# Allegro board CUITBIKE_V1.1_MSP430.brd
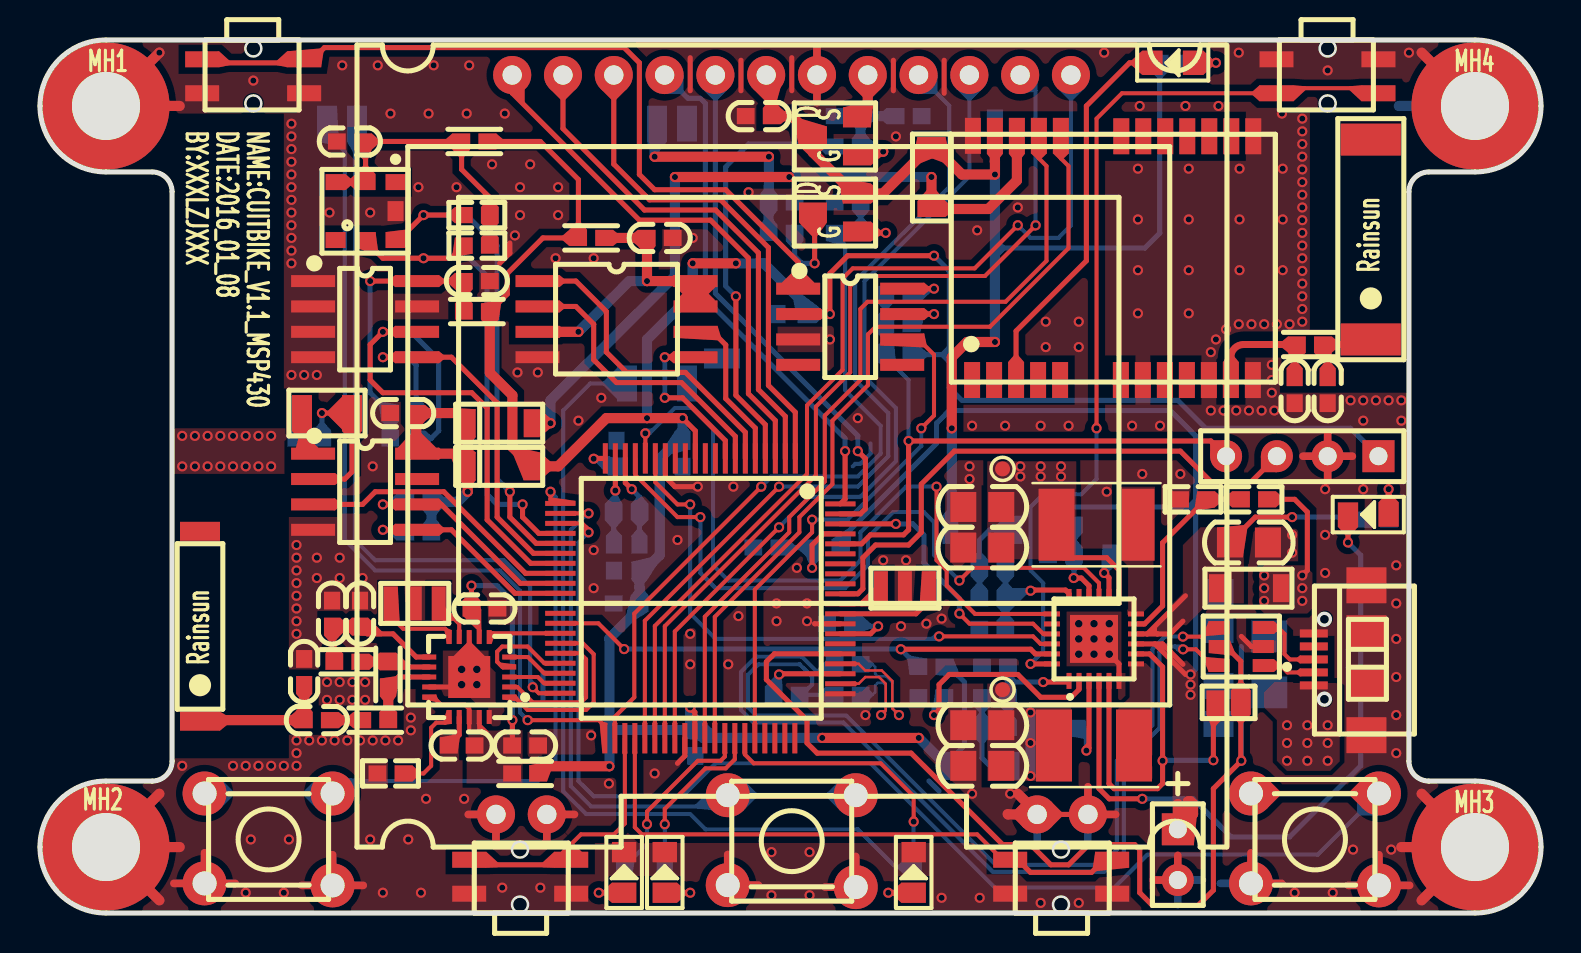
[diagram p0: board, top side]
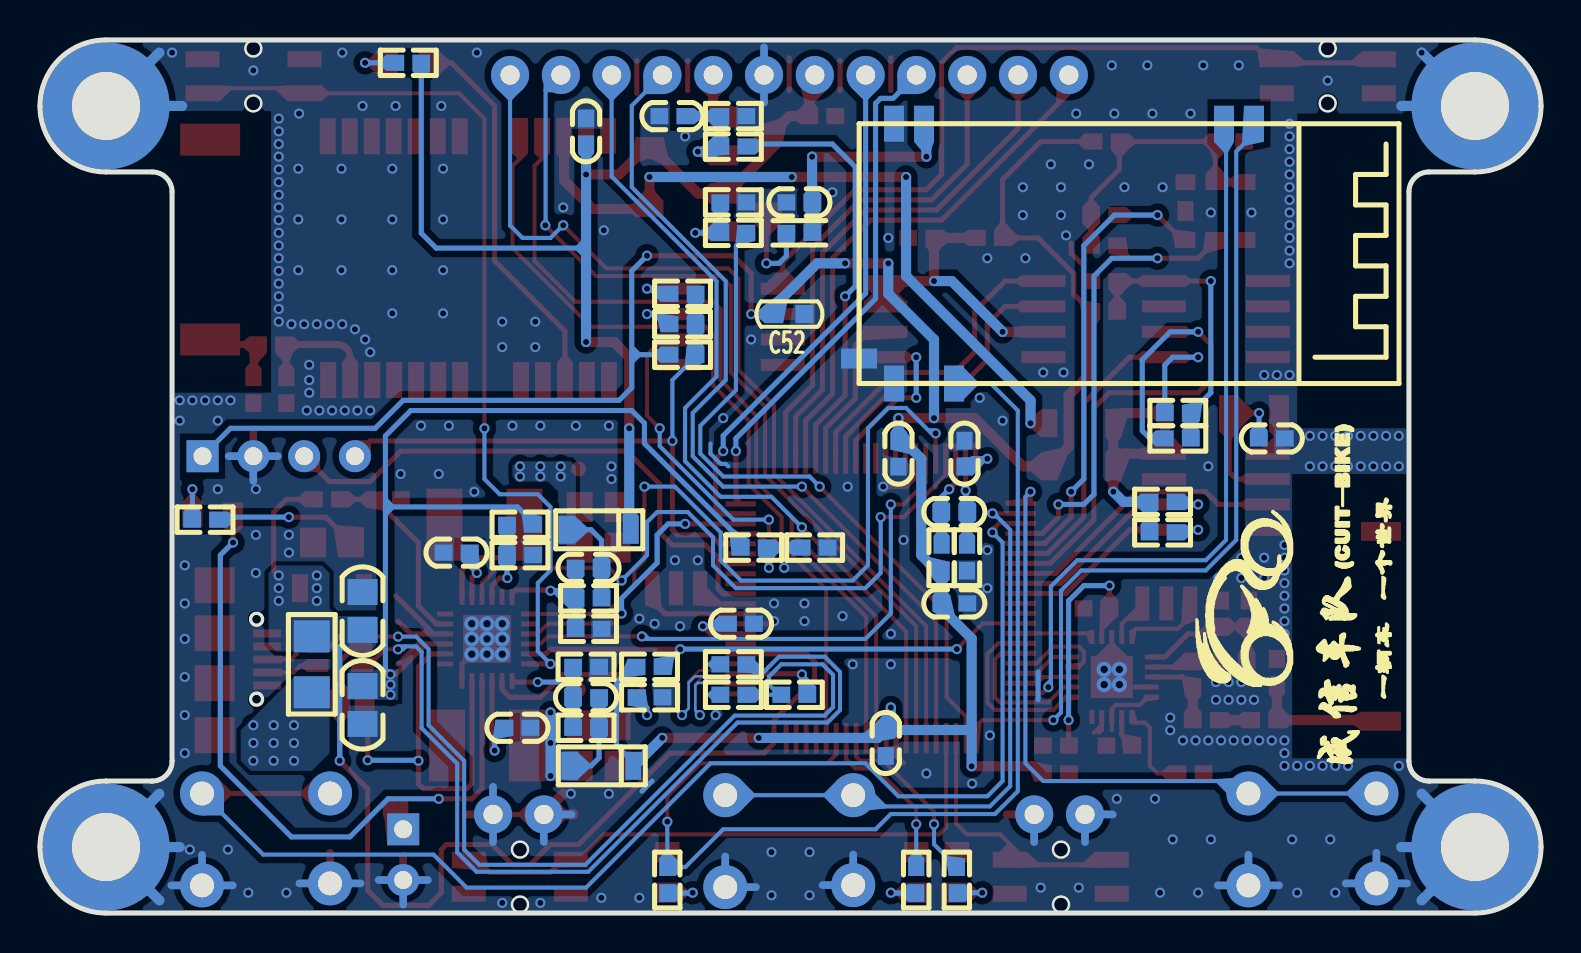
[diagram p1: board, bottom side, seen from below]

Outline 75.06 x 43.69 mm; copper layers: TOP, BOTTOM. Coordinates in mm from the lower left corner of the outline.
Outline path: 0,40.39 arc(0.97,42.72) 3.3,43.69 71.75,43.69 arc(74.09,42.72) 75.06,40.39 arc(74.09,38.05) 71.75,37.08 69.45,37.08 arc(68.75,36.79) 68.45,36.08 68.45,7.6 arc(68.75,6.9) 69.45,6.6 71.75,6.6 arc(74.09,5.64) 75.06,3.3 arc(74.09,0.97) 71.75,0 3.3,0 arc(0.97,0.97) 0,3.3 arc(0.97,5.64) 3.3,6.6 5.6,6.6 arc(6.31,6.9) 6.6,7.6 6.6,36.08 arc(6.31,36.79) 5.6,37.08 3.3,37.08 arc(0.97,38.05) 0,40.39

## Design rules (mm)
net group DP1: nets USB_DN USB_DP

## Placement (name value [footprint] x y rotation side)
ANT1  -  [AN9520-245]  8 14.35 90 top
ANT2  -  [GPS1003-1575]  66.55 28.7 90 top
BAT1  -  [BATTERY]  56.9 4.19 270 top
C1  10uF  [C0805]  58.93 15.11 270 bottom
C2  10uF  [C0805]  60.45 18.54 180 top
C3  0.1uF  [C0603]  54.23 18.03 180 bottom
C4  0.1uF  [C0603]  51.18 9.27 0 bottom
C5  10pF  [C0603]  47.62 17.27 180 bottom
C6  10uF  [C0805]  47.12 18.29 0 top
C7  10uF  [C0805]  47.12 20.32 0 top
C8  10pF  [C0603]  47.75 10.79 180 bottom
C9  10uF  [C0805]  47.12 9.4 0 top
C10  10uF  [C0805]  47.12 7.37 0 top
C11  10uF  [C0805]  58.93 10.41 90 bottom
C12  0.1uF  [C0603]  40.01 14.48 180 bottom
C16  10uF  [C0603]  29.34 15.49 0 bottom
C17  0.1uF  [C0603]  32.13 22.99 90 bottom
C18  0.1uF  [C0603]  32.77 8.51 90 bottom
C19  0.1uF  [C0603]  29.34 20.07 0 bottom
C20  0.1uF  [C0603]  28.83 22.99 270 bottom
C21  0.1uF  [C0603]  18.16 25.02 180 top
C22  0.1uF  [C0603]  21.84 31.62 0 top
C23  12pF  [C0603]  13.46 23.75 0 bottom
C24  0.1uF  [C0603]  15.49 38.61 180 top
C25  0.1uF  [C0603]  21.08 8.38 0 top
C26  0.1uF  [C0603]  30.99 33.78 180 top
C27  0.1uF  [C0603]  24.26 8.38 0 top
C28  1.5pF  [C0603]  13.84 9.65 180 top
C29  1pF  [C0603]  13.21 12.06 90 top
C33  0.1uF  [C0603]  22.23 15.24 0 top
C34  2.2nF  [C0603]  16 14.99 90 top
C35  4.7pF  [C0603]  14.61 14.99 90 top
C36  0.1uF  [C0603]  35.94 39.88 0 top
C37  10nF  [C0603]  43.43 39.88 180 bottom
C38  0.1uF  [C0603]  47.75 39.12 270 bottom
C42  0.1uF  [C0603]  37.08 35.56 0 bottom
C43  10nF/NI  [C0603]  62.74 26.16 90 top
C44  10nF/NI  [C0603]  64.39 26.16 90 top
C52  0.1uF  [CC0603]  37.59 29.97 180 bottom
D1  MBRM120  [SOD-123]  60.45 16.26 180 top
D2  MBR0520  [SOD-123]  22.99 22.35 180 top
D4  MBR0520  [SOD-123]  22.99 24.51 180 top
D5  MBRM120  [SOD-123]  44.58 36.83 270 top
D6  MBR0520  [SOD-123]  46.99 7.37 180 bottom
D7  MBR0520  [SOD-123]  47.12 19.18 180 bottom
F1  1.5A  [R1206]  61.47 12.45 90 bottom
J1  JUMP_2P  [JUMP-2P]  59.44 10.54 180 top
J2  CON4  [SIP-4-2R5]  66.93 22.86 180 top
L1  4.7uH  [L4532-P]  52.83 19.43 180 top
L2  4.7uH  [L4532-P]  52.7 8.38 180 top
L3  BEAD  [L0603]  21.72 38.61 0 top
L4  BEAD  [L0603]  21.84 30.1 0 top
L5  BEAD  [L0603]  24.26 6.99 180 top
L6  BEAD  [L0603]  27.56 33.78 180 top
L8  3.9nH  [L0603]  16.76 9.65 180 top
L9  8.2nH  [L0603]  17.4 11.94 90 top
L10  2.7nH  [L0603]  15.37 12.57 180 top
L12  BEAD  [L0603]  37.08 34.04 180 bottom
L13  0R  [L0603]  63.5 28.45 180 top
LED1  LED-RED  [LED0805]  66.42 19.94 180 top
LED2  LED-RED  [LED0805]  29.21 2.03 90 top
LED3  LED-RED  [LED0805]  31.24 2.03 90 top
LED5  LED-GREEN/NI  [LED0805]  56.64 42.55 180 top
LED6  LED-GREEN  [LED0805]  43.69 2.03 90 top
MH1  Hold  [HOLD250D134]  3.3 40.39 0 top
MH2  Hold  [HOLD250D134]  3.3 3.3 0 top
MH3  Hold  [HOLD250D134]  71.75 3.3 0 top
MH4  Hold  [HOLD250D134]  71.75 40.39 0 top
NOREF  -  []  3.3 0 90 top
NOREF#2  -  []  0 3.3 0 top
Q1  SI2301  [SOT23-MOS]  39.75 38.86 90 top
Q2  SI2301  [SOT23-MOS]  39.75 35.05 90 top
R1  1M  [R0603]  44.58 12.32 180 bottom
R2  1.24K  [R0603]  66.8 19.68 0 bottom
R3  3.32K  [R0603]  60.71 20.7 180 top
R4  1.24K  [R0603]  57.66 20.7 180 top
R5  249k  [R0603]  47.62 15.75 0 bottom
R6  1.24K  [R0603]  44.58 10.79 180 bottom
R7  2.49M  [R0603]  51.05 19.43 0 bottom
R8  249k  [R0603]  47.75 9.27 0 bottom
R9  80.6K  [R0603]  47.62 14.22 180 bottom
R10  1.5K  [R0603]  37.34 10.92 0 bottom
R11  22R  [R0603]  40.39 10.92 0 bottom
R12  22R  [R0603]  40.39 12.45 0 bottom
R13  806K  [R0603]  51.05 17.91 180 bottom
R14  80.6K  [R0603]  47.75 12.32 180 bottom
R15  200K  [R0603]  39.37 18.29 180 bottom
R16  100K  [R0603]  36.32 18.29 180 bottom
R18  0R  [R0603]  29.97 17.78 90 bottom
R19  0R  [R0603]  28.7 17.78 90 bottom
R20  470R  [R0603]  29.21 1.65 270 bottom
R21  470R  [R0603]  31.24 1.65 270 bottom
R22  4.7K  [R0603]  21.84 34.92 180 top
R23  4.7K  [R0603]  21.84 33.4 180 top
R24  4.7K  [R0603]  18.16 23.75 0 bottom
R25  4.7K  [R0603]  18.16 25.02 0 bottom
R26  4.7K  [R0603]  18.92 20.57 180 bottom
R27  4.7K  [R0603]  18.92 19.05 180 bottom
R31  22K  [R0603]  17.53 6.99 180 top
R32  10K  [R0603]  40.39 38.35 0 bottom
R33  100K  [R0603]  40.39 39.88 180 bottom
R34  510R/NI  [R0603]  56.64 42.55 180 bottom
R36  470R  [R0603]  43.69 1.65 270 bottom
R37  100K  [R0603]  40.39 35.56 0 bottom
R38  10K  [R0603]  40.39 34.04 180 bottom
R40  47K  [R0603]  42.93 27.94 0 bottom
R44  0R/NI  [R0603]  42.93 30.99 0 bottom
R45  0R/NI  [R0603]  42.93 29.46 0 bottom
SW1  SW-4P-5R4x4R5  [SW-4P-5R4X4R5]  66.93 41.02 180 top
SW2  RESET  [SW-4P-5R4X4R5]  13.21 41.02 180 top
SW3  BACK  [SW-6X6]  11.43 3.68 270 top
SW4  ENTER  [SW-6X6]  37.59 3.6 270 top
SW5  MENU  [SW-6X6]  63.75 3.68 270 top
SW6  UP  [SW-4P-5R4X4R5]  48.51 2.67 0 top
SW7  DOWN  [SW-4P-5R4X4R5]  21.46 2.67 0 top
TP1  TEST P  [TP-0R75]  48.13 22.23 0 top
TP2  TEST P  [TP-0R75]  48.13 11.18 0 top
U1  LTC3455  [QFN-24]  52.7 13.72 90 top
U2  USBLC6-2  [SOT23-6]  60.07 13.34 90 top
U3  MSP430F5529  [QFP-80]  33.02 15.75 270 top
U4  -  [BMP180]  16.26 35.18 270 top
U5  AT24Cxx  [SOIC8]  16.26 29.72 270 top
U6  PCF8563  [SOIC8]  16.26 21.08 270 top
U8  W25Qxx  [SO-8-208]  28.83 29.72 270 top
U9  NRF24L01  [TQFN-4X4-20]  21.46 11.81 90 top
U10  -  [JLX12864G-086]  23.62 41.91 0 top
U11  -  [NEO-6M]  46.61 26.67 90 top
U12  -  [HC-06]  14.35 39.5 270 bottom
U16  SP706REN  [SOIC8]  40.51 29.34 270 top
USB1  -  [USB-MICRO]  63.63 12.7 90 top
X1  CSTCE-8M00  [X-3P-3R2X1R3-SMD]  44.45 16.26 180 top
X3  32.768K  [X-2P-3R2X1R5-SMD]  14.35 25.02 180 top
X4  CSTCE-16M00  [X-3P-3R2X1R3-SMD]  19.94 15.49 180 top

## Library data of the parts
ANT1 ANT2 = AN9520-245
BAT1 = BATTERY
C1-C12 C16-C29 C33-C38 C42-C44 = CAP
C52 = C_Generic
D1 D2 D4-D7 = D SCHOTTKY
F1 = FUSE
J1 = JUMP_2P
J2 = CON4
L1-L6 L8-L10 L12 L13 = INDUCTOR
LED1-LED3 LED5 LED6 = LED
MH1-MH4 = Hold_1
Q1 Q2 = MOS P
R1-R16 R18-R27 R31-R34 R36-R38 R40 R44 R45 = RES1
SW1-SW7 = SWITCH-SPST-4P
TP1 TP2 = TEST P
U1 = LTC3455
U2 = USBLC6-2
U3 = MSP430F5529
U4 = BMP180
U5 = AT24Cxx
U6 = PCF8563
U8 = W25Qxx
U9 = NRF24L01
U10 = JLX12864G-086
U11 = NEO-6M
U12 = HC-06
U16 = SP706T
USB1 = USB-MINI
X1 X4 = CSTCE-8M00
X3 = XTAL

## Footprints (pads in the part's own frame, mm; a bottom-side part is the same pattern mirrored in y, then rotated)
AN9520-245
  rect 0.95x2 smd: 1(-4.75,0) 2(4.75,0)
BATTERY
  rect 1.6x1.6 hole 0.9: 1(0,0)
  round 1.6 hole 0.9: 2(2.54,0)
BMP180
  rect 0.8x1 smd: 1(-1.397,1.524) 2(-1.397,0.024) 3(-1.397,-1.476) 4(1.503,-1.476) 5(1.503,0.024) 6(1.503,1.524)
  rect 1x0.8 smd: 7(0.053,1.524)
C0603
  rect 0.89x0.81 smd: 1(-0.65,0) 2(0.65,0)
C0805
  rect 1.3x1.5 smd: 1(-0.95,0) 2(0.95,0)
CC0603
  rect 0.914x0.914 smd: 1(-0.762,0) 2(0.762,0)
GPS1003-1575
  rect 1.6x3 smd: 1(0,0) 2(10,0)
HC-06
  rect 1.8x1 smd: 1(0,0) 2(0,-1.5) 12(0,-16.5) 13(0,-18) 22(13,-18) 24(13,-15)
  rect 1x1.8 smd: 21(11.75,-19.75)
HOLD250D134
  round 6.35 hole 3.404: 1(0,0)
JLX12864G-086
  round 1.905 hole 0.965: 1(27.93,0.024) 2(25.39,0.024) 3(22.85,0.024) 4(20.31,0.024) 5(17.77,0.024) 6(15.23,0.024) 7(12.69,0.024) 8(10.15,0.024) 9(7.61,0.024) 10(5.07,0.024) 11(2.53,0.024) 12(-0.01,0.024) 13(-0.82,-36.976) 14(1.72,-36.976) 15(26.24,-36.976) 16(28.78,-36.976)
JUMP-2P
  rect 1x1.2 smd: 1(-0.61,0) 2(0.61,0)
L0603
  rect 0.89x0.81 smd: 1(-0.65,0) 2(0.65,0)
L4532-P
  rect 1.8x3.6 smd: 1(-2,0) 2(2,0)
LED0805
  rect 1.016x1.219 smd: 1(-1.016,0) 2(1.016,0)
NEO-6M
  rect 1.8x0.8 smd: 1(0,0) 2(0,-1.1) 3(0,-2.2) 4(0,-3.3) 5(0,-4.4) 6(0,-7.44) 7(0,-8.54) 8(0,-9.64) 9(0,-10.74) 10(0,-11.84) 11(0,-12.94) 12(0,-14.04) 13(12.2,-14.06) 14(12.2,-12.96) 15(12.2,-11.86) 16(12.2,-10.76) 17(12.2,-9.66) 18(12.2,-8.56) 19(12.2,-7.46) 20(12.22,-4.44) 21(12.22,-3.34) 22(12.22,-2.24) 23(12.22,-1.14) 24(12.22,-0.04)
QFN-24
  rect 0.8x0.25 smd: 1(-2.1,1.25) 2(-2.1,0.75) 3(-2.1,0.25) 4(-2.1,-0.25) 5(-2.1,-0.75) 6(-2.1,-1.25) 13(2.1,-1.25) 14(2.1,-0.75) 15(2.1,-0.25) 16(2.1,0.25) 17(2.1,0.75) 18(2.1,1.25)
  rect 0.25x0.8 smd: 7(-1.25,-2.1) 8(-0.75,-2.1) 9(-0.25,-2.1) 10(0.25,-2.1) 11(0.75,-2.1) 12(1.25,-2.1) 19(1.25,2.1) 20(0.75,2.1) 21(0.25,2.1) 22(-0.25,2.1) 23(-0.75,2.1) 24(-1.25,2.1)
  rect 2.4x2.4 smd: 25(0,0)
QFP-80
  rect 1.52x0.25 smd: 1(-7,4.75) 2(-7,4.25) 3(-7,3.75) 4(-7,3.25) 5(-7,2.75) 6(-7,2.25) 7(-7,1.75) 8(-7,1.25) 9(-7,0.75) 10(-7,0.25) 11(-7,-0.25) 12(-7,-0.75) 13(-7,-1.25) 14(-7,-1.75) 15(-7,-2.25) 16(-7,-2.75) 17(-7,-3.25) 18(-7,-3.75) 19(-7,-4.25) 20(-7,-4.75) 41(7,-4.775) 42(7,-4.275) 43(7,-3.775) 44(7,-3.275) 45(7,-2.775) 46(7,-2.275) 47(7,-1.775) 48(7,-1.275) 49(7,-0.775) 50(7,-0.275) 51(7,0.225) 52(7,0.725) 53(7,1.225) 54(7,1.725) 55(7,2.225) 56(7,2.725) 57(7,3.225) 58(7,3.725) 59(7,4.225) 60(7,4.725)
  rect 0.25x1.52 smd: 21(-4.75,-7) 22(-4.25,-7) 23(-3.75,-7) 24(-3.25,-7) 25(-2.75,-7) 26(-2.25,-7) 27(-1.75,-7) 28(-1.25,-7) 29(-0.75,-7) 30(-0.25,-7) 31(0.25,-7) 32(0.75,-7) 33(1.25,-7) 34(1.75,-7) 35(2.25,-7) 36(2.75,-7) 37(3.25,-7) 38(3.75,-7) 39(4.25,-7) 40(4.75,-7) 61(4.775,7) 62(4.275,7) 63(3.775,7) 64(3.275,7) 65(2.775,7) 66(2.275,7) 67(1.775,7) 68(1.275,7) 69(0.775,7) 70(0.275,7) 71(-0.225,7) 72(-0.725,7) 73(-1.225,7) 74(-1.725,7) 75(-2.225,7) 76(-2.725,7) 77(-3.225,7) 78(-3.725,7) 79(-4.225,7) 80(-4.725,7)
R0603
  rect 0.89x0.81 smd: 1(-0.65,0) 2(0.65,0)
R1206
  rect 1.6x1.8 smd: 1(-1.4,0) 2(1.4,0)
SIP-4-2R5
  rect 1.6x1.6 hole 0.9: 1(0,0)
  round 1.6 hole 0.9: 2(2.54,0) 3(5.08,0) 4(7.62,0)
SO-8-208
  rect 0.6x2.2 smd: 1(-1.905,-3.95) 2(-0.635,-3.95) 3(0.635,-3.95) 4(1.905,-3.95) 5(1.905,3.95) 6(0.635,3.95) 7(-0.635,3.95) 8(-1.905,3.95)
SOD-123
  rect 0.8x1.4 smd: 1(-1.6,0) 2(1.6,0)
SOIC8
  rect 0.6x2.2 smd: 1(-1.905,-2.6) 2(-0.635,-2.6) 3(0.635,-2.6) 4(1.905,-2.6) 5(1.905,2.6) 6(0.635,2.6) 7(-0.635,2.6) 8(-1.905,2.6)
SOT23-6
  rect 0.65x1.06 smd: 1(-0.95,-1.1) 2(0,-1.1) 3(0.95,-1.1) 4(0.95,1.1) 5(0,1.1) 6(-0.95,1.1)
SOT23-MOS
  rect 1x1.4 smd: 1(-0.95,-1.1) 2(0.95,-1.1) 3(0,1.1)
SW-4P-5R4X4R5
  rect 1.7x0.8 smd: 1(0,0) 2(5.1,0) 3(0,-1.7) 4(5.1,-1.7)
SW-6X6
  round 2.2 hole 1.2: 1(-2.3,3.2) 2(-2.3,-3.2) 3(2.3,3.2) 4(2.2,-3.2)
TP-0R75
  round 0.75 smd: 1(0,0)
TQFN-4X4-20
  rect 0.25x0.7 smd: 1(-1,-2) 2(-0.5,-2) 3(0,-2) 4(0.5,-2) 5(1,-2) 11(1,2) 12(0.5,2) 13(0,2) 14(-0.5,2) 15(-1,2)
  rect 0.7x0.25 smd: 6(2,-1) 7(2,-0.5) 8(2,0) 9(2,0.5) 10(2,1) 16(-2,1) 17(-2,0.5) 18(-2,0) 19(-2,-0.5) 20(-2,-1)
  rect 2.1x2.1 smd: 21(0,0)
USB-MICRO
  rect 0.4x1.4 smd: 1(-1.31,-0.07) 2(-0.66,-0.07) 3(-0.01,-0.07) 4(0.64,-0.07) 5(1.29,-0.07)
  rect 1.8x2 smd: 6(-3.8,-2.7) 7(-1.2,-2.7) 8(1.3,-2.7) 9(3.7,-2.7)
X-2P-3R2X1R5-SMD
  rect 1x1.8 smd: 1(-1.25,0) 2(1.25,0)
X-3P-3R2X1R3-SMD
  rect 0.7x1.7 smd: 1(0,0) 2(1.2,0) 3(2.4,0)

## Nets
GND: BAT1.2 C1.1 C2.1 C3.1 C4.1 C6.1 C7.1 C9.1 C10.1 C11.1 C12.2 C16.1 C17.1 C18.1 C20.1 C21.2 C22.2 C23.1 C24.2 C25.1 C26.1 C27.2 C29.2 C33.2 C34.2 C35.2 C36.1 C37.1 C38.1 C42.2 C43.1 C44.1 C52.2 J2.2 LED2.2 LED3.2 LED6.2 MH1.1 MH2.1 MH3.1 MH4.1 R4.2 R6.2 R9.2 R13.2 R14.2 R16.2 R19.1 R31.2 R33.2 R37.1 SW1.3 SW1.4 SW2.1 SW2.2 SW3.3 SW3.4 SW4.3 SW4.4 SW5.3 SW5.4 SW6.3 SW6.4 SW7.3 SW7.4 U1.6(SUSPEND) U1.25(GND) U2.2(GND) U3.14(AVSS1) U3.49(DVSS2) U3.61(VSSU) U3.68(AVSS2) U4.7(GND) U5.1(A0) U5.2(A1) U5.3(A2) U5.4(GND) U5.7(WP) U6.4(VSS) U8.4(GND) U9.8(VSS_1) U9.14(VSS_2) U9.17(VSS_3) U9.20(VSS_4) U9.21(GND) U10.6(VSS) U10.13(NC_4) U10.14(NC_3) U10.15(NC_2) U10.16(NC_1) U11.7(VDDUSB) U11.10(GND_1) U11.12(GND_2) U11.13(GND_3) U11.24(GND_4) U12.13(GND_1) U12.21(GND_2) U12.22(GND_3) U16.3(GND) USB1.5(GND) USB1.6(S1) USB1.7(S2) USB1.8(S3) USB1.9(S4) X1.2 X4.2
VBUS: C1.2 D1.1 F1.2 J1.1 R3.1 U2.5(VCC) U3.65(VBUS)
VCC1_3V3: C16.2 C17.2 C18.2 C52.1 D2.1 D6.2 J2.1 L3.2 L4.2 L5.1 L6.2 R1.1 R18.1 R40.2 U3.11(AVCC1) U3.50(DVCC2) U16.2(VCC)
VCC2_3V3: C36.2 C38.2 D5.1 D7.2 Q1.3 Q2.2 R34.2 U10.7(VDD) U11.23(VCC)
VCC_BAT: BAT1.1 C11.2 R7.1 R15.1 U1.9(VBAT)
VCC_BKUP: D4.1 D5.2 U11.22(V_BCKP)
3455_HSON: U1.15(HSON) U3.17(P8.2)
3455_MODE: U1.21(MODE) U3.78(P6.1/CB1/A1)
3455_ON2: U1.19(ON2) U3.16(P8.1)
3455_PBSTAT: R1.2 U1.23(PBSTAT) U3.33(P2.4/TA2.1)
3455_PWRON: U1.22(PWRON) U3.15(P8.0)
12864_CS: U3.3(P6.6/CB6/A6) U10.12(CS)
12864_EN: R32.1 U3.4(P6.7/CB7/A7)
12864_RESET: U3.2(P6.5/CB5/A5) U10.11(RESET)
12864_ROM_CS: U3.45(P4.0/PM_UCB1STE/PM_UCA1CLK) U10.4(ROM_CS)
12864_ROM_IN: U3.46(P4.1/PM_UCB1SIMO/PM_UCB1SDA) U10.1(ROM_IN)
12864_ROM_OUT: U3.47(P4.2/PM_UCB1SOMI/PM_UCB1SCL) U10.2(ROM_OUT)
12864_ROM_SCK: U3.48(P4.3/PM_UCB1CLK/PM_UCA1STE) U10.3(ROM_SCK)
12864_RS: U3.1(P6.4/CB4/A4) U10.10(RS)
12864_SCL: U3.79(P6.2/CB2/A2) U10.8(SCLK)
12864_SDA: U3.80(P6.3/CB3/A3) U10.9(SDA)
/RST: J2.4 R40.1 R44.1 R45.1 U3.76(R\S\T\/NMI/SBWTDIO)
ADC_BAT: R15.2 R16.1 U3.77(P6.0/CB0/A1)
AT24CXX_SCL: R24.2 U3.27(P1.6/TA1CLK/CBOUT) U5.6(SCL)
AT24CXX_SDA: R25.2 U3.26(P1.5/TA0.4) U5.5(SDA)
BMP180_SCL: R23.2 U3.24(P1.3/TA0.2) U4.5(SCL)
BMP180_SDA: R22.2 U3.25(P1.4/TA0.3) U4.6(SDA)
BT_EN: R38.2 U3.42(P3.5/TB0.5)
BT_LED: R36.1 U3.55(P5.6/TB0.0) U12.24(PIO1)
BT_RXD: U3.40(P3.3/UCA0TXD/UCA0SIMO) U12.2(UART_RXD)
BT_TXD: U3.41(P3.4/UCA0RXD/UCA0SOMI) U12.1(UART_TXD)
GPS_RXD: U3.51(P4.4/PM_UCA1TXD/PM_UCA1SIMO) U11.21(RXD1)
GPS_TXD: U3.52(P4.5/PM_UCA1RXD/PM_UCA1SOMI) U11.20(TXD1)
HMC5883L_SCL: U3.31(P2.2/TA2CLK/SMCLK)
HMC5883L_SDA: U3.32(P2.3/TA2.0)
NRF24L01_CE: U3.35(P2.6/RTCCLK/DMAE0) U9.1(CE)
NRF24L01_CSN: U3.36(P2.7/UCB0STE/UCA0CLK) U9.2(CSN)
NRF24L01_IRQ: U3.34(P2.5/TA2.2) U9.6(IRQ)
NRF24L01_MISO: U3.38(P3.1/UCB0SOMI/UCB0SCL) U9.5(MISO)
NRF24L01_MOSI: U3.37(P3.0/UCB0SIMO/UCB0SDA) U9.4(MOSI)
NRF24L01_SCK: U3.39(P3.2/UCB0CLK/UCA0STE) U9.3(SCK)
P1.0: SW3.1 SW3.2 U3.21(P1.0/TA0CLK/ACLK)
P1.1: SW4.1 SW4.2 U3.22(P1.1/TA0.0)
P1.2: SW5.1 SW5.2 U3.23(P1.2/TA0.1)
P3.6: SW7.1 SW7.2 U3.43(P3.6/TB0.6)
P3.7: SW6.1 SW6.2 U3.44(P3.7/TBOUTH/SVMOUT)
P4.6: R20.1 U3.53(P4.6/PM_NONE)
P4.7: R21.1 U3.54(P4.7/PM_NONE)
P5.7: U3.56(P5.7/TB0.1) U16.6(WDI)
PCF8563_INT: U3.28(P1.7/TA1.0) U6.3(I\N\T\)
PCF8563_SCL: R26.2 U3.29(P2.0/TA1.1) U6.6(SCL)
PCF8563_SDA: R27.2 U3.30(P2.1/TA1.2) U6.5(SDA)
TEST: J2.3 U3.71(TEST/SBWTCK)
USB_DN: R12.2 U3.64(PU.1/DM)
USB_DP: R11.2 U3.62(PU.0/DP)
USB_PUR: R10.1 U3.63(PUR)
VMAX: C2.2 D1.2 R2.1 U1.10(VMAX)
VUSBOUT: U3.66(VUSB)
W25QXX_CS: U3.6(P7.1/CB9/A13) U8.1(C\S\)
W25QXX_SPI_CLK: U3.5(P7.0/CB8/A12) U8.6(CLK)
W25QXX_SPI_MISO: U3.7(P7.2/CB10/A14) U8.2(DO)
W25QXX_SPI_MOSI: U3.8(P7.3/CB11/A15) U8.5(DI)
N11600: C24.1 L3.1 R22.1 R23.1 U4.2(VDD) U4.3(VDDIO)
N12321: C22.1 L4.1 R24.1 R25.1 U5.8(VCC)
N13413: C26.2 L6.1 U8.3(W\P\) U8.7(H\O\L\D\) U8.8(VCC)
N16975: U6.1(OSCI) X3.2
N16982: C23.2 U6.2(OSCO) X3.1
N17872: C21.1 D2.2 D4.2 R26.1 R27.1 U6.8(VDD)
N20495: R31.1 U9.16(IREF)
N20883: U9.9(XC2) X4.1
N20890: U9.10(XC1) X4.3
N21363: C25.2 C27.1 C33.1 L5.2 U9.7(VDD_1) U9.15(VDD_2) U9.18(VDD_3) U9.19(DVDD)
N22760: L8.1 L9.1 U9.13(ANT2)
N22769: L9.2 L10.1 U9.12(ANT1)
N22838: C34.1 C35.1 L10.2 U9.11(VDD_PA)
N23293: ANT1.1 C28.2 C29.1
N35776: C42.1 L12.2 U12.12(3.3V)
N35854: LED6.1 R36.2
N49336: C20.2 U3.20(VCORE)
N50226: U3.70(P5.3/XT2OUT) X1.3
N50230: U3.69(P5.2/XT2IN) X1.1
N50234: C12.1 U3.67(V18)
N51487: C19.1 R19.2 U3.19(DVSS1)
N51523: C19.2 R18.2 U3.18(DVCC1)
N65101: Q2.1 R37.2 R38.1
N66864: C37.2 Q1.1 R32.2 R33.1
N137490: ANT2.1 C44.2 L13.1
N141719: LED5.2 U11.3(TIMEPULSE)
N173353: R7.2 R13.1 U1.16(AI)
N173581: R3.2 R4.1 U1.11(WALLFB)
N173653: R10.2 R11.1 U2.4(IO2_O)
N173707: C4.2 U1.3(TIMER)
N173743: R6.1 U1.2(PROG)
N173847: J1.2 U1.5(USBHP) U1.8(USB)
N173883: C5.1 R5.2 R9.1 U1.18(FB2)
N173931: LED1.2 U1.4(C\H\R\G\)
N173943: LED1.1 R2.2
N173969: U2.1(IO1_I) USB1.2(D-)
N173973: U2.3(IO2_I) USB1.3(D+)
N174029: R12.1 U2.6(IO1_O)
N174157: SW1.1 SW1.2 U1.24(O\N\)
N174185: L1.1 U1.12(SW2)
N174205: L2.1 U1.7(SW1)
N174365: C8.2 C9.2 C10.2 D6.1 L2.2 R8.1 TP2.1
N174377: C5.2 C6.2 C7.2 D7.1 L1.2 R5.1 TP1.1 U1.13(HSI)
N174389: C8.1 R8.2 R14.1 U1.1(FB1)
N174663: C3.2 U1.14(HSO)
N176009: Q1.2 U10.5(LEDA)
N213516: C43.2 L13.2 U11.11(RF_IN)
N227281: C28.1 L8.2
N403830: L12.1 Q2.3
N640780: LED2.1 R20.2
N641980: LED3.1 R21.2
N1416060: LED5.1 R34.1
N1734530: F1.1 USB1.1(VBUS)
N10973881: SW2.3 SW2.4 U16.1(MR_N)
N109732791: R44.2 U16.8(WDO_N)
N109733756: R45.2 U16.7(RST_N)

Pads without a net: ANT1 2; ANT2 2; U1 17 20; U3 9 10 12 13 57 58 59 60 72 73 74 75; U4 1 4; U6 7; U11 1 2 4 5 6 8 9 14 15 16 17 18 19; U16 4 5; USB1 4

## Via types
v1: diameter 0.508, hole 0.305, TOP to BOTTOM, 371 vias
v2: diameter 0.762, hole 0.381, TOP to BOTTOM, 13 vias

## Routing (per net, layer and track width the routed paths; a pad name or vN(x,y) marks a point on that pad's centre or on a via; arc(x,y) is an arc through that point)
GND: length 189.1
  TOP w0.203: U9.8 U9.21
  TOP w0.254: 32.24,8.75 32.24,7.86 31.88,7.49 ; U3.68 38.74,14.47 38.73,14.48 ; 37.59,42.8 37.59,41.15 ; 22.99,32.51 23.5,33.02 23.5,33.53 ; U9.21 v2(21.08,11.43) 20.96,11.31 U9.14 ; U9.17 20.96,8.91 C25.1 ; U3.14 31.27,21.82 31.75,21.34 v1(32.89,21.34) ; 35.05,42.67 35.05,41.15 ; 32.51,42.8 32.51,41.15 ; v2(52.7,13.72) v2(53.47,12.95) 53.95,12.47 U1.6 ; 60.07,13.84 60.58,13.34 U2.2 ; 45.21,42.67 45.21,41.02 ; 42.67,42.67 42.67,41.15 ; U10.16 U10.15
  TOP w0.381: 65.42,1.38 SW5.3 ; SW5.3 68.49,1.38 ; SW5.3 66.95,2.92 ; 13.1,1.38 SW3.3 ; SW3.3 14.63,2.92 ; SW3.3 16.16,1.38 ; J2.2 65.62,22.86 ; J2.2 63.16,22.86 ; J2.2 64.39,21.63 ; J2.2 64.39,24.09 ; 40.79,2.83 40.79,1.3 39.26,1.3 ; 38.85,43.32 U10.6 38.85,40.55 ; 60.55,3.02 60.55,1.48 62.09,1.48 ; 8.23,1.48 9.76,1.48 ; 8.23,1.48 6.7,1.48 ; 8.23,1.48 8.23,3.02 ; 35.92,1.4 SW4.4 34.39,2.93 ; 52.4,6.32 U10.16 53.79,4.93 ; 25.34,3.55 U10.14 26.73,4.93 ; 21.42,4.93 U10.13 22.8,3.55 ; 56.9,2.88 56.9,1.65 55.66,1.65
  TOP w0.508: MH3.1 69.09,0.64 ; MH3.1 68.07,3.3 ; MH3.1 69.09,5.97 ; 6.99,40.39 MH1.1 v1(5.97,43.05) ; MH2.1 5.97,0.64 ; MH2.1 5.97,5.97 ; MH2.1 6.99,3.3 ; 48.39,4.95 48.41,4.93 U10.15 49.86,5 48.9,5.97 ; MH4.1 69.09,43.05
  BOTTOM w0.203: 41.53,23.5 41.53,22.99 41.02,22.48 40.77,22.48 40.64,22.35
  BOTTOM w0.254: 25.15,10.67 25.15,12.06 ; 44.45,6.6 44.96,6.1
  BOTTOM w0.381: 39.26,1.3 40.79,1.3 40.79,2.83 ; 59.02,1.48 62.09,1.48 ; 48.48,4.93 U10.15 49.86,3.55 ; 13.1,1.38 SW3.3 ; SW3.3 14.63,2.92 ; SW3.3 16.16,1.38 ; SW5.3 68.49,1.38 ; SW5.3 65.42,1.38 ; SW5.3 66.95,2.92 ; 63.16,22.86 J2.2 ; J2.2 64.39,21.63 ; J2.2 65.62,22.86 ; 34.39,2.93 SW4.4 35.92,1.4 ; 56.9,1.65 58.13,1.65 ; 56.9,1.65 55.66,1.65 ; 56.9,1.65 56.9,0.42 ; 21.42,4.93 U10.13 22.8,3.55 ; 6.7,1.48 8.23,1.48 ; 8.23,1.48 8.23,3.02 ; 8.23,1.48 9.76,1.48 ; 25.34,3.55 U10.14 ; 38.85,43.32 U10.6 38.85,40.55 ; 52.4,3.55 U10.16 52.4,6.32
  BOTTOM w0.508: MH2.1 5.97,0.64 ; MH2.1 5.97,5.97 ; MH2.1 6.99,3.3 ; MH3.1 69.09,5.97 ; MH3.1 69.09,0.64 ; MH3.1 68.07,3.3 ; 67.94,40.39 MH4.1 69.09,43.05 ; 6.99,40.39 MH1.1 v1(5.97,43.05)
  vias: v1(7.11,23.88) v1(7.11,22.35) v1(7.11,7.37) v1(7.75,23.88) v1(7.75,22.35) v1(8.38,23.88) v1(8.38,22.35) v1(9.02,23.88) v1(9.02,22.35) v1(9.65,23.88) v1(9.65,22.35) v1(9.65,7.37) v1(10.29,23.88) v1(10.29,22.35) v1(10.29,7.37) v1(10.29,1.02) v1(10.54,3.68) v1(10.67,41.66) v1(10.92,23.88) v1(10.92,22.35) v1(10.92,7.37) v1(11.56,23.88) v1(11.56,22.35) v1(11.56,7.37) v1(12.19,7.37) v1(12.19,1.02) v1(12.45,3.68) v1(12.57,39.5) v1(12.57,38.86) v1(12.57,38.23) v1(12.57,37.59) v1(12.57,36.96) v1(12.57,36.32) v1(12.57,35.69) v1(12.57,35.05) v1(12.57,34.42) v1(12.57,33.78) v1(12.57,33.15) v1(12.57,32.51) v1(12.57,26.92) v1(12.83,18.41) v1(12.83,17.78) v1(12.83,17.14) v1(12.83,16.51) v1(12.83,15.88) v1(12.83,15.24) v1(12.83,14.61) v1(12.83,13.97) v1(12.83,8.64) v1(12.83,8) v1(12.83,7.37) v1(13.21,26.92) v1(13.46,8.64) v1(13.84,26.92) v1(13.84,17.78) v1(13.84,16.76) v1(14.1,8.64) v1(14.35,11.56) v1(14.35,10.67) v1(14.48,35.05) v1(14.73,8.64) v1(14.99,17.78) v1(14.99,16.76) v1(14.99,11.56) v1(14.99,10.67) v1(15.11,42.42) v1(15.37,8.64) v1(15.62,11.56) v1(15.62,10.67) v1(16,8.64) v1(16.13,16.76) v1(16.26,11.56) v1(16.26,10.67) v1(16.51,35.05) v1(16.51,3.68) v1(16.64,22.35) v1(16.64,8.64) v1(16.89,42.42) v1(17.14,1.02) v1(17.27,8.64) v1(17.53,40.01) v1(17.91,8.64) v1(18.41,3.68) v1(18.54,9.78) v1(18.54,9.14) v1(18.92,36.32) v1(19.05,1.02) v1(19.3,5.71) v1(19.43,40.01) v1(19.68,42.42) v1(20.83,36.32) v1(21.21,5.71) v1(21.34,40.01) v1(21.46,42.42) v1(22.61,37.47) v1(23.11,1.27) v1(23.24,40.01) v1(23.75,33.91) v1(23.88,27.05) v1(24,36.32) v1(24,34.92) v1(24.51,37.47) v1(24.89,27.05) v1(25.02,1.27) v1(25.78,32.77) v1(25.91,36.32) v1(25.91,34.92) v1(26.92,24.64) v1(27.56,8.89) v1(27.69,32.77) v1(27.69,18.16) v1(27.69,16.26) v1(28.07,25.78) v1(28.45,6.48) v1(30.73,6.99) v1(31.88,18.67) v1(32.51,13.97) v1(32.51,12.45) v1(32.64,33.78) v1(34.42,12.45) v1(34.67,21.34) v1(34.92,14.86) v1(35.43,36.07) v1(36.58,3.05) v1(36.58,0.89) v1(36.83,15.49) v1(36.83,14.61) v1(37.85,17.27) v1(38.35,15.49) v1(38.35,14.61) v1(38.48,3.05) v1(38.48,0.89) v1(39.5,28.7) v1(40.89,24.77) v1(41.27,9.91) v1(42.16,17.65) v1(42.8,38.86) v1(43.05,14.35) v1(43.31,17.65) v1(44.32,14.48) v1(45.09,14.73) v1(45.09,0.76) v1(46.48,22.35) v1(46.48,21.72) v1(46.61,24.38) v1(46.61,5.97) v1(46.86,34.16) v1(46.99,0.76) v1(48.26,24.38) v1(48.51,5.97) v1(48.9,35.31) v1(50.04,24.38) v1(50.04,0.51) v1(50.29,29.59) v1(50.29,28.32) v1(51.44,24.38) v1(51.94,29.59) v1(51.94,28.32) v1(51.94,0.51) v1(53.21,43.05) v1(53.34,21.08) v1(54.61,24.38) v1(54.9,37.25) v1(54.9,34.71) v1(54.9,32.17) v1(54.9,30.01) v1(54.99,40.39) v1(55.12,21.97) v1(56.01,24.38) v1(57.02,21.97) v1(57.28,40.39) v1(57.44,37.25) v1(57.44,34.71) v1(57.44,32.17) v1(57.44,30.01) v1(58.55,28.07) v1(58.55,25.15) v1(58.8,28.7) v1(58.93,40.39) v1(59.18,25.15) v1(59.31,29.21) v1(59.82,25.15) v1(59.94,43.05) v1(59.94,29.46) v1(59.98,37.25) v1(59.98,34.71) v1(59.98,32.17) v1(60.45,25.15) v1(60.58,29.46) v1(61.09,25.15) v1(61.21,29.46) v1(61.59,27.43) v1(61.59,26.67) v1(61.59,26.04) v1(61.72,25.15) v1(61.85,29.46) v1(62.1,40.01) v1(62.14,37.25) v1(62.14,34.71) v1(62.14,32.17) v1(62.48,29.46) v1(62.61,18.92) v1(62.61,18.03) v1(62.74,1.02) v1(63.12,39.75) v1(63.12,39.12) v1(63.12,38.48) v1(63.12,37.85) v1(63.12,37.21) v1(63.12,36.58) v1(63.12,35.94) v1(63.12,35.31) v1(63.12,34.67) v1(63.12,34.04) v1(63.12,33.4) v1(63.12,32.77) v1(63.12,32.13) v1(63.12,31.5) v1(63.12,30.86) v1(63.12,30.23) v1(63.12,29.59) v1(64.26,21.21) v1(64.26,18.92) v1(64.26,17.02) v1(64.39,42.16) v1(64.64,1.02) v1(65.53,25.65) v1(65.66,3.17) v1(66.17,25.65) v1(66.17,24.64) v1(66.17,21.21) v1(66.8,25.65) v1(67.44,25.65) v1(67.56,3.17) v1(67.82,17.4) v1(67.82,15.49) v1(67.82,13.72) v1(67.82,11.81) v1(67.82,9.91) v1(67.82,8) v1(68.07,25.65) v1(68.07,24.64) v1(68.45,43.05) v2(21.08,12.19) v2(21.84,12.19) v2(21.84,11.43) v2(51.94,14.48) v2(51.94,13.72) v2(51.94,12.95) v2(52.7,14.48) v2(52.7,12.95) v2(53.47,14.48) v2(53.47,13.72)
VBUS: length 59.6
  TOP w0.254: v1(63.12,16.89) 63.37,17.14 63.37,20.07 62.74,20.7 R3.1 ; U2.5 59.31,13.34 60.05,12.6 J1.1 60.05,7.65 v1(60.07,7.62) 58.67,6.22 58.67,1.14 57.91,0.38 55.63,0.38 54.99,1.02 54.99,3.17 54.74,3.43 52.45,3.43 51.44,2.41 50.55,2.41 49.53,3.43 48.13,3.43 43.56,8 38.86,8 38.35,8.51 38.35,9.65 36.32,11.68 36.32,12.57 36.72,12.97 U3.65
  BOTTOM w0.254: v1(60.07,7.62) 60.07,13.34
  vias: v1(61.21,16.89) v1(61.21,16.26) v1(61.21,15.62) v1(63.12,16.26) v1(63.12,15.62)
VCC1_3V3: length 141.2
  TOP w0.254: v1(32.51,10.29) 32.74,10.05 32.74,8.75 ; U16.2 v1(39.5,29.97) 39.5,32 40.39,32.89 v1(44.7,32.89) ; L4.2 23.37,30.97 23.37,32 25.15,33.78 26.91,33.78 26.92,33.8 26.92,36.7 25.02,38.61 22.37,38.61 ; v1(32.13,24.77) 32.77,24.13 U3.11
  TOP w0.508: v1(34.8,32.51) v1(32.64,32.51) ; L4.2 22.49,27.04 23.62,25.91 23.62,23.32 D2.1 25.91,22.35 28.32,24.77 v1(30.35,24.77) v1(32.13,24.77) ; v1(43.94,8.76) v1(39.12,8.76) ; v1(28.47,7.34) 25.38,7.34 25.02,6.99 L5.1
  BOTTOM w0.254: 45.47,27.94 45.47,32.13 v1(44.7,32.89) ; 45.47,27.94 R40.2 ; 45.47,27.94 45.47,26.29 46.1,25.65 56.9,25.65 58.29,24.26 65.53,24.26 J2.1 ; v1(39.5,29.97) C52.1 ; D6.2 45.39,7.54 46.23,8.38 46.23,11.56 45.47,12.32 R1.1
  BOTTOM w0.508: C18.2 33.16,8.76 v1(39.12,8.76) ; C18.2 28.48,9.16 28.47,9.14 ; C18.2 32.51,9.41 v1(32.51,10.29) ; v1(34.8,32.51) 36.2,32.51 38.35,30.35 C52.1 ; v1(32.13,24.77) C17.2 31.89,23.64 30.99,22.73 30.99,17.91 30.21,17.13 R18.1 29.97,16.3 29.99,16.28 C16.2 29.99,15.26 28.47,13.74 28.47,9.14 ; v1(32.64,32.51) 32.64,30.99 30.35,28.7 v1(30.35,24.77) ; v1(43.94,8.76) 45.16,7.54 45.39,7.54 ; 28.47,9.14 v1(28.47,7.34)
VCC2_3V3: length 57.1
  TOP w0.508: v1(47.75,28.57) 46.36,28.57 45.59,27.81 v1(45.59,24.26) ; U10.7 36.59,41.66 C36.2 37.59,39.88 38.61,38.86 38.65,38.86 38.65,38.06 40.71,36 Q2.2 42.15,36 D5.1 44.63,38.43 46.1,36.96 v1(47.75,36.96) 47.75,37.61 47.75,37.61 U11.23
  BOTTOM w0.254: R34.2 55.99,34.02 55.24,33.27 47.75,33.27
  BOTTOM w0.508: C38.2 v1(47.75,36.96) v1(47.75,28.57) ; v1(45.59,24.26) 45.59,19.56 45.52,19.48 D7.2
VCC_BAT: length 51.4
  TOP w0.254: 55.75,13.47 56.13,13.47 57.15,12.45 ; 55.75,13.47 57.28,11.94 ; 55.75,13.47 U1.9
  TOP w0.508: 56.9,4.32 57.4,4.83 57.4,5.59 57.53,5.59 57.66,5.46 57.66,4.95 BAT1.1 56.9,4.32 ; 56.9,4.32 56.9,5.46
  BOTTOM w0.254: R15.1 40.02,18.68 44.83,23.5 44.83,24.51 45.47,25.15 56.52,25.15 57.78,23.88 57.78,20.32 ; v1(57.53,11.94) 57.78,12.19 57.78,20.32 ; 57.78,20.32 51.18,20.32 50.4,19.54 R7.1
  vias: v1(57.53,11.43) v1(57.53,10.92)
VCC_BKUP: length 37.4
  TOP w0.508: D4.1 v1(25.53,24.51) ; 48.85,38.89 48.85,36.66 47.42,35.23 D5.2 v1(44.58,36.83) ; v1(31.75,36.83) v1(37.47,36.83)
  BOTTOM w0.508: v1(44.58,36.83) v1(37.47,36.83) ; v1(25.53,24.51) 25.53,25.65 31.75,31.88 v1(31.75,36.83)
3455_HSON: length 34.1
  TOP w0.203: U3.17 29.77,21.92 31.88,19.81 v1(33.02,19.81) ; v1(45.97,16.64) 46.61,17.27 52.2,17.27 52.95,16.51 U1.15
  BOTTOM w0.203: v1(45.97,16.64) 44.7,17.91 44.7,19.56 44.2,20.07 42.67,20.07 41.4,18.8 41.4,17.4 40.26,16.26 33.78,16.26 33.02,17.02 v1(33.02,19.81)
3455_MODE: length 14.1
  TOP w0.203: U1.21 50.17,13.97 49.66,14.48 46.48,14.48 v1(45.97,14.99)
  TOP w0.254: U3.78 v1(42.8,19.47)
  BOTTOM w0.254: v1(45.97,14.99) 45.97,15.75 44.2,17.53 44.2,18.92 43.65,19.47 v1(42.8,19.47)
3455_ON2: length 37.7
  TOP w0.203: U1.19 46.76,14.97 45.34,16.38 45.34,17.15 44.83,17.65 v1(44.83,21.34) ; U3.16 v1(30.27,24)
  BOTTOM w0.203: v1(44.83,21.34) 43.31,21.34 41.02,19.05 41.02,17.65 40.01,16.64 34.42,16.64 33.66,17.4 33.66,24.26 32.64,25.27 31.75,25.27 30.48,24 v1(30.27,24)
3455_PBSTAT: length 26.5
  TOP w0.203: U3.33 27.92,14.5 v1(29.21,13.21)
  TOP w0.254: U1.23 49.77,12.97 49.54,13.2 v1(43.05,13.2)
  BOTTOM w0.254: v1(29.21,13.21) 43.04,13.21 v1(43.05,13.2) R1.2
3455_PWRON: length 27.7
  TOP w0.203: v1(44.96,13.84) 49.66,13.84 50.03,13.47 U1.22 ; U3.15 30.77,21.55 31.88,20.45 v1(32.51,20.45)
  BOTTOM w0.203: v1(44.96,13.84) 44.83,13.72 33.78,13.72 32.51,14.99 v1(32.51,20.45)
12864_CS: length 26.7
  TOP w0.254: U10.12 23.61,41.03 29.97,34.67 33.53,34.67 35.42,32.77 35.42,25.99 36.77,24.64 U3.3
12864_EN: length 21.4
  TOP w0.254: U3.4 36.27,24.44 34.8,25.91 v1(34.8,30.86)
  BOTTOM w0.254: v1(34.8,30.86) 34.29,31.37 34.29,37.34 35.43,38.48 39.61,38.48 R32.1
12864_RESET: length 25.9
  TOP w0.254: U3.2 37.27,24.85 35.92,26.2 35.92,33.04 33.78,35.18 30.23,35.18 26.15,39.25 U10.11
12864_ROM_CS: length 43.8
  TOP w0.203: 30.25,8.75 30.25,14.62 v1(36.96,21.34)
  BOTTOM w0.203: v1(36.96,21.34) 40.89,21.34 42.42,22.86 42.42,25.02 40.77,26.67 40.77,31.62 45.47,36.32 45.47,40.4 U10.4
12864_ROM_IN: length 47.5
  TOP w0.203: 30.75,8.75 30.75,14.36 38.35,21.97 38.35,25.4 40.13,27.18 40.13,31.75 40.64,32.26 46.74,32.26 v1(48.9,34.42)
  BOTTOM w0.203: U10.1 51.55,34.41 50.93,33.78 49.53,33.78 v1(48.9,34.42)
12864_ROM_OUT: length 44.8
  TOP w0.203: v1(49.79,34.41) 47.25,31.88 41.02,31.88 40.51,31.37 40.51,27.05 38.8,25.34 38.8,21.91 31.25,14.35 31.25,8.75
  BOTTOM w0.203: v1(49.79,34.41) 49.77,34.43 49.77,41.17 U10.2
12864_ROM_SCK: length 42.1
  TOP w0.203: 31.75,8.75 31.75,14.09 v1(36.96,19.3)
  BOTTOM w0.203: v1(36.96,19.3) 38.48,20.83 41.02,20.83 42.8,22.61 42.8,25.27 41.23,26.85 41.23,31.61 46.47,36.86 U10.3
12864_RS: length 25
  TOP w0.254: U3.1 37.77,25.06 36.42,26.4 36.42,33.3 34.04,35.69 30.48,35.69 28.69,37.48 U10.10
12864_SCL: length 26.2
  TOP w0.254: U3.79 41.02,19.97 41.27,20.23 41.27,22.73 v1(40.89,23.11)
  BOTTOM w0.254: v1(40.89,23.11) 40.89,23.89 33.77,31.01 U10.8
12864_SDA: length 25.7
  TOP w0.254: v1(40.26,23.11) 40.26,20.71 U3.80
  BOTTOM w0.254: U10.9 32.4,40.77 33.02,40.77 33.27,40.51 33.27,30.73 40.26,23.75 v1(40.26,23.11)
/RST: length 32.2
  TOP w0.254: 59.31,22.86 58.55,23.62 v1(43.43,23.62) 43.43,19.18 43.18,18.92 41.53,18.92 41.08,18.47 U3.76
  BOTTOM w0.203: R40.1 42.28,27.83 43.43,26.67 v1(43.43,23.62)
  BOTTOM w0.254: R44.1 R45.1 R40.1
ADC_BAT: length 5.6
  TOP w0.254: v1(38.61,17.27) 38.61,18.41 39.17,18.97 U3.77
  BOTTOM w0.254: v1(38.61,17.27) 38.61,18.18 R15.2 R16.1
AT24CXX_SCL: length 29.2
  TOP w0.254: U5.6 v1(17.14,29.08) 16.51,28.45 16.51,26.67 17.14,26.04 21.59,26.04 22.36,25.27 22.36,19.68 24.54,17.5 U3.27
  BOTTOM w0.254: v1(17.14,29.08) 18.54,29.08 19.94,27.69 19.94,24.13 19.56,23.75 R24.2
AT24CXX_SDA: length 20.5
  TOP w0.254: U3.26 24.67,18 22.86,19.81 22.86,25.53 20.57,27.81 U5.5 v1(17.14,27.81)
  BOTTOM w0.254: v1(17.14,27.81) 18.41,27.81 18.81,27.42 R25.2
BMP180_SCL: length 24.9
  TOP w0.254: R23.2 20.56,32.77 v1(19.18,32.77) 17.14,32.77 16.28,33.63 U4.5 ; U3.24 24.94,19 24.13,19.81 v1(24.13,20.45)
  BOTTOM w0.254: v1(19.18,32.77) 21.46,32.77 22.35,31.88 22.35,20.95 22.86,20.45 v1(24.13,20.45)
BMP180_SDA: length 25.2
  TOP w0.254: U3.25 24.81,18.5 23.5,19.81 v1(23.5,21.08) ; R22.2 v1(19.18,34.92) 17.93,33.68 U4.6
  BOTTOM w0.254: v1(19.18,34.92) 21.34,34.92 22.86,33.4 22.86,21.72 v1(23.5,21.08)
BT_EN: length 34.3
  TOP w0.203: 28.75,8.75 28.75,9.82 29.72,10.79 29.72,14.99 v1(36.07,21.34)
  BOTTOM w0.203: v1(36.07,21.34) 36.58,21.84 40.89,21.84 42.04,22.99 42.04,24.38 40.26,26.16 40.26,33.4 39.74,33.92 R38.2
BT_LED: length 55.6
  TOP w0.203: 35.24,8.75 35.24,7.93 35.69,7.49 42.04,7.49 43.69,5.84 v1(43.69,4.57)
  BOTTOM w0.203: v1(43.69,4.57) R36.1 42.78,2.3 40.89,4.19 33.27,4.19 32.51,4.95 27.3,4.95 26.16,6.1 26.16,25.15 27.51,26.5 U12.24
BT_RXD: length 37.2
  TOP w0.203: v1(24.64,11.3) 24.94,11 U3.40
  BOTTOM w0.203: v1(24.64,11.3) 24.51,11.43 24.51,16.34 23.2,17.65 16.76,17.65 15.75,18.67 15.75,39.39 U12.2
BT_TXD: length 42.2
  TOP w0.203: 28.25,8.75 28.25,9.35 27.94,9.65 v1(24.38,9.65)
  BOTTOM w0.203: U12.1 14.35,38.99 15.24,38.1 15.24,18.67 16.76,17.14 22.99,17.14 24,16.13 24,10.03 v1(24.38,9.65)
GPS_RXD: length 41.4
  TOP w0.203: U11.21 49.95,37.76 50.33,37.38 50.33,32.64 48.28,30.59 41.38,30.59 41.02,30.23 41.02,26.67 39.24,24.89 39.24,21.59 37.47,19.81 37.47,19.05 33.24,14.83 33.24,8.75
GPS_TXD: length 41
  TOP w0.203: U11.20 51.05,37.76 51.43,37.38 51.43,33.27 47.5,29.34 41.78,29.34 41.4,28.96 41.4,26.42 39.62,24.64 39.62,21.46 37.97,19.81 37.97,19.05 33.74,14.82 33.74,8.75
NRF24L01_CE: length 9
  TOP w0.203: U3.35 27.14,13.5 27.69,12.95 27.69,10.54 27.3,10.16 24.38,10.16 23.73,10.81 U9.1
NRF24L01_CSN: length 7.6
  TOP w0.203: U9.2 23.87,11.31 24.64,10.54 27.05,10.54 27.3,10.79 27.3,12.7 27.01,13 U3.36
NRF24L01_IRQ: length 3.6
  TOP w0.203: U3.34 22.65,14 U9.6
NRF24L01_MISO: length 2.9
  TOP w0.203: U9.5 24.4,12.81 25.21,12 U3.38
NRF24L01_MOSI: length 4.8
  TOP w0.203: U9.4 23.12,12.31 22.86,12.57 22.86,13.08 23.11,13.34 24.38,13.34 25.22,12.5 U3.37
NRF24L01_SCK: length 2.7
  TOP w0.203: U9.3 24.89,11.81 25.2,11.5 U3.39
P1.0: length 32.8
  TOP w0.203: v1(25.53,21.08) 25.53,20.7 25.73,20.5 U3.21
  BOTTOM w0.203: SW3.2 SW3.1 15.25,6.6 24.89,6.6 25.78,7.49 25.78,20.83 v1(25.53,21.08)
P1.1: length 30.4
  TOP w0.203: v1(27.43,20) U3.22
  BOTTOM w0.203: v1(27.43,20) 27.36,20 26.54,19.18 26.54,6.35 27.56,5.33 33.83,5.33 SW4.2 SW4.1
P1.2: length 66.3
  TOP w0.203: v1(27.43,19.05) 27.43,19.18 27.11,19.5 U3.23
  TOP w0.254: SW5.2 SW5.1
  BOTTOM w0.203: SW5.1 63.89,2.92 55.37,2.92 53.72,1.27 47.75,1.27 41.53,7.49 33.78,7.49 32.13,5.84 27.69,5.84 26.92,6.6 26.92,18.54 v1(27.43,19.05)
P3.6: length 13.5
  TOP w0.203: SW7.2 26.56,3.45 27.05,3.94 28.7,3.94 29.25,4.48 29.25,8.75
  TOP w0.254: SW7.1 21.72,2.41 26.31,2.41 SW7.2
P3.7: length 30.3
  TOP w0.203: 49.15,2.41 48.9,2.67 SW6.1 48.13,2.67 46.86,3.94 30.1,3.94 29.75,4.29 29.75,8.75
  TOP w0.254: SW6.2 53.21,2.67 52.58,2.03 49.53,2.03 49.15,2.41 48.77,2.41 SW6.1
P4.6: length 9.2
  TOP w0.203: 34.24,8.75 34.24,7.83 34.04,7.62 32.89,7.62 30.35,5.08 v1(30.35,4.45)
  BOTTOM w0.203: v1(30.35,4.45) 30.35,3.44 R20.1
P4.7: length 8.5
  TOP w0.203: 34.74,8.75 34.74,7.69 34.29,7.24 33.27,7.24 31.24,5.21 v1(31.24,4.45)
  BOTTOM w0.203: v1(31.24,4.45) R21.1
P5.7: length 25.9
  TOP w0.203: v1(38.61,19.68) 38.61,19.05 35.74,16.19 35.74,8.75 ; U16.6 43.94,28.7 44.7,27.94 44.7,24.89 v1(44.07,24.26)
  BOTTOM w0.203: v1(38.61,19.68) 40.39,19.68 44.07,23.37 v1(44.07,24.26)
PCF8563_INT: length 14.3
  TOP w0.254: U6.3 16.13,20.45 16.76,21.08 20.19,21.08 24.28,17 U3.28
PCF8563_SCL: length 11.7
  TOP w0.203: U6.6 v1(17.14,20.45)
  TOP w0.254: U3.29 24.02,16.5 20.07,20.45 U6.6
  BOTTOM w0.203: R26.2 18.15,20.45 v1(17.14,20.45)
PCF8563_SDA: length 11.4
  TOP w0.203: U6.5 v1(17.14,19.18)
  TOP w0.254: U6.5 20.57,19.18 23.75,16 U3.30
  BOTTOM w0.203: R27.2 18.15,19.18 v1(17.14,19.18)
TEST: length 28.3
  TOP w0.254: 61.85,22.86 60.58,21.59 58.55,21.59 57.02,23.11 45.72,23.11 44.07,21.46 44.07,19.05 43.43,18.41 41.78,18.41 41.15,17.78 41.15,16.23 40.89,15.97 U3.71
USB_DN: length 8.7
  TOP w0.127: U3.64 40.93,12.47 41.27,12.14 42.09,12.14 42.62,11.61 42.62,10.24 v1(42.95,9.91)
  BOTTOM w0.127: R12.2 41.63,12.45 41.76,12.32 41.76,11.98 41.89,11.85 42.3,11.85 42.62,11.53 42.62,10.24 v1(42.95,9.91)
USB_DP: length 7.5
  TOP w0.127: U3.62 40.93,11.47 41.27,11.81 41.95,11.81 42.29,11.47 42.29,10.14 v1(42.06,9.91)
  BOTTOM w0.127: v1(42.06,9.91) 42.29,10.14 42.29,11.39 42.16,11.52 41.89,11.52 41.76,11.39 41.76,11.05 41.63,10.92 R11.2
USB_PUR: length 4.2
  TOP w0.254: v1(36.96,11.94) 36.99,11.97 U3.63
  BOTTOM w0.254: v1(36.96,11.94) 36.96,11.19 R10.1
VMAX: length 12.5
  TOP w0.254: 55.88,13.97 55.88,13.97 ; 55.88,13.97 55.37,13.97 ; 55.88,13.97 56.51,13.97 57.15,14.61 ; 55.37,13.97 U1.10 ; 55.37,13.97 57.28,15.88 ; v1(62.61,19.81) 60.77,19.81 C2.2
  BOTTOM w0.254: R2.1 66.03,19.81 v1(62.61,19.81)
W25QXX_CS: length 16
  TOP w0.254: U3.6 35.27,24.06 32.28,27.05 29.34,27.05 28.32,28.07 28.32,30.1 26.8,31.62 U8.1
W25QXX_SPI_CLK: length 8.1
  TOP w0.254: U8.6 33.64,29.08 34.29,28.43 34.29,25.74 35.77,24.26 U3.5
W25QXX_SPI_MISO: length 14.7
  TOP w0.254: U8.2 26.8,30.35 27.69,29.46 27.69,27.69 28.83,26.54 32.08,26.54 34.77,23.85 U3.7
W25QXX_SPI_MOSI: length 8.4
  TOP w0.254: U8.5 v1(31.24,27.81) ; U3.8 34.27,23.64 32.13,25.78 v1(31.24,25.78)
  BOTTOM w0.254: v1(31.24,27.81) v1(31.24,25.78)
N11600: length 14.3
  TOP w0.254: R23.1 R22.1 22.49,35.8 21.08,37.21 21.08,38.59 L3.1 C24.1 16.28,38.47 U4.2 U4.3
N12321: length 14.5
  TOP w0.254: v1(16.51,31.62) U5.8 C22.1 L4.1
  BOTTOM w0.254: R24.1 R25.1 17.51,25.03 16.51,26.04 v1(16.51,31.62)
N13413: length 14.5
  TOP w0.508: v1(26.92,29.08) U8.3 ; L6.1 C26.2 30.35,33.77 v1(30.35,31.62) U8.8 U8.7
  BOTTOM w0.508: v1(30.35,31.62) 29.46,31.62 v1(26.92,29.08)
N16975: length 2.4
  TOP w0.254: U6.1 13.36,22.99 13.1,23.24 X3.2
N16982: length 7.8
  TOP w0.254: 13.66,21.72 15.24,21.72 15.6,22.08 X3.1 v1(14.1,25.02)
  BOTTOM w0.254: C23.2 14.1,23.76 v1(14.1,25.02)
N17872: length 15.3
  TOP w0.508: 21.39,23.11 21.26,22.99 20.75,22.99 ; 21.39,23.11 21.39,22.35 ; 21.39,23.11 21.39,24.51 20.88,25.02 C21.1 18.81,23.03 U6.8 20.75,22.99 ; 21.39,22.35 v1(21.39,21.08) ; 21.39,22.35 20.75,22.99
  BOTTOM w0.508: v1(21.39,21.08) 20.88,20.57 R26.1 R27.1
N20495: length 4.6
  TOP w0.203: R31.1 19.18,6.99 19.56,7.37 19.56,9.27 19.81,9.53 20.26,9.53 20.46,9.73 U9.16
N20883: length 2.4
  TOP w0.203: X4.1 19.94,14.99 20.19,14.73 20.7,14.73 20.96,14.47 U9.9
N20890: length 4.1
  TOP w0.203: X4.3 17.54,14.85 18.16,14.22 20.26,14.22 20.46,14.02 U9.10
N21363: length 17.3
  TOP w0.203: 21.96,9.41 22.35,9.02 ; 21.96,9.41 U9.19 ; 21.96,9.41 21.96,9.15 22.1,9.02 ; C33.1 21.7,15.37 21.76,15.37 21.96,15.16 U9.7 ; U9.15 19.67,10.81 20.07,10.41 21.26,10.41 21.46,10.21 U9.18 21.46,9.14
  TOP w0.254: C33.1 v1(21.57,16.38) ; v1(23.62,9.65) 23.62,8.4 C27.1
  BOTTOM w0.254: v1(23.62,9.65) 23.62,15.62 22.86,16.38 v1(21.57,16.38)
N22760: length 3.9
  TOP w0.254: U9.13 17.92,11.81 L9.1
  TOP w0.508: L9.1 17.41,11.27 L8.1
N22769: length 3.6
  TOP w0.254: U9.12 17.68,12.31 L9.2 16.03,12.59 L10.1
N22838: length 7.3
  TOP w0.254: U9.11 18.81,12.81 17.65,13.97 16.37,13.97 C34.1 C35.1 14.61,12.69 L10.2
N23293: length 7
  TOP w0.35: 8.76,9.65 8.05,9.65 ANT1.1
  TOP w0.508: 8.76,9.65 C28.2 13.21,9.67 C29.1
N35776: length 11.2
  TOP w0.508: v1(36.45,37.85) v1(30.73,37.85)
  BOTTOM w0.508: v1(30.73,37.85) 30.73,39.38 U12.12 ; L12.2 C42.1 36.43,36.35 36.45,36.36 v1(36.45,37.85)
N35854: length 2.5
  TOP w0.254: LED6.1 v1(42.42,1.02)
  BOTTOM w0.254: R36.2 42.43,1 v1(42.42,1.02)
N49336: length 1.9
  TOP w0.254: v1(27.69,22.73) 27.7,22.75 U3.20
  BOTTOM w0.254: v1(27.69,22.73) 28.43,22.73 C20.2
N50226: length 2.6
  TOP w0.254: X1.3 42.05,15.76 41.76,15.47 U3.70
N50230: length 5.3
  TOP w0.254: X1.1 44.45,15.62 43.8,14.97 U3.69
N50234: length 3.4
  TOP w0.254: U3.67 41.53,13.97 v1(41.91,14.35)
  BOTTOM w0.254: v1(41.91,14.35) 40.78,14.35 C12.1
N51487: length 4.4
  TOP w0.254: U3.19 v1(28.77,21.14)
  BOTTOM w0.254: R19.2 28.7,19.13 28.69,19.14 C19.1 28.77,20.15 v1(28.77,21.14)
N51523: length 4.6
  TOP w0.254: v1(29.59,21.21) 29.27,21.53 U3.18
  BOTTOM w0.254: v1(29.59,21.21) 29.99,20.81 C19.2 29.99,19.41 29.97,19.39 R18.2
N65101: length 4.2
  TOP w0.254: Q2.1 40.92,34.04 v1(42.29,34.04)
  BOTTOM w0.254: R37.2 R38.1 v1(42.29,34.04)
N66864: length 5.9
  TOP w0.508: v1(42.16,38.1) 41.04,38.1 Q1.1
  BOTTOM w0.508: C37.2 R33.1 R32.2 41.29,38.1 v1(42.16,38.1)
N137490: length 4.2
  TOP w0.35: C44.2 64.39,28.21 L13.1 66.29,28.45 ANT2.1
N141719: length 19.4
  TOP w0.254: 48.81,26.67 48.81,29.12 52.32,32.64 52.32,40.39 54.48,42.55 LED5.2
N173353: length 4.2
  TOP w0.254: U1.16 52.45,16.38 52.07,16.76 v1(51.69,16.76)
  BOTTOM w0.254: R7.2 R13.1 51.7,16.78 v1(51.69,16.76)
N173581: length 9.7
  TOP w0.254: R3.2 R4.1 56.13,18.53 56.13,15.37 55.23,14.47 U1.11
N173653: length 44.8
  TOP w0.203: U2.4 58.61,14.29 58.15,13.83 v1(57.15,13.83)
  BOTTOM w0.203: R11.1 38.1,10.92 ; 38.1,10.92 38.61,11.43 38.61,11.83 37.99,12.45 35.92,12.45 35.4,11.92 35.4,10.3 35.82,9.88 40.32,9.88 47.79,2.41 53.09,2.41 53.85,3.17 53.85,7.62 55.63,9.4 55.63,13.21 56.25,13.83 v1(57.15,13.83) ; 38.1,10.92 R10.2
N173707: length 4.9
  TOP w0.254: U1.3 52.45,8.26 v1(52.32,8.13)
  BOTTOM w0.254: 51.83,9.27 52.32,8.78 v1(52.32,8.13)
N173743: length 11
  TOP w0.254: v1(44.7,9.91) 44.96,10.16 44.96,11.43 45.47,11.94 48.9,11.94 50.04,10.79 51.56,10.79 51.95,11.19 U1.2
  BOTTOM w0.254: v1(44.7,9.91) 44.7,10.27 R6.1
N173847: length 21
  TOP w0.254: v1(58.67,7.65) 58.67,10.39 J1.2 ; U1.8 55.49,12.97 56.13,12.32 v1(56.13,7.62) 56.13,6.48 55.88,6.22 53.71,6.22 53.45,6.48 U1.5
  BOTTOM w0.254: v1(58.67,7.65) 56.16,7.65 v1(56.13,7.62)
N173883: length 6.6
  TOP w0.254: U1.18 51.45,15.98 51.28,16.16 49.56,16.16 v1(49.53,16.13)
  BOTTOM w0.254: R5.2 C5.1 ; R5.2 R9.1 ; R5.2 48.66,16.13 v1(49.53,16.13)
N173931: length 33.8
  TOP w0.254: U1.4 52.95,6.23 53.47,5.71 v1(55.12,5.71) ; v1(65.41,18.54) LED1.2
  BOTTOM w0.254: v1(65.41,18.54) 66.04,17.91 66.04,7.37 62.48,3.81 59.56,3.81 57.66,5.71 v1(55.12,5.71)
N173943: length 2.8
  TOP w0.254: 67.44,19.94 v1(67.44,21.21)
  BOTTOM w0.254: v1(67.44,21.21) 67.44,20.36 67.45,20.34 R2.2
N173969: length 2.7
  TOP w0.203: USB1.2 62.38,12.04 62.04,12.38 61.17,12.38
N173973: length 3.8
  TOP w0.203: U2.3 61.91,14.29 62.23,13.97 62.23,12.95 62.49,12.69 USB1.3
N174029: length 44.6
  TOP w0.203: v1(57.16,13.2) 57.8,13.2 58.61,12.38 58.97,12.38
  BOTTOM w0.203: v1(57.16,13.2) 56.91,13.2 56.76,13.34 56.25,13.34 55.97,13.06 55.97,9.25 54.2,7.48 54.2,3.03 53.23,2.07 47.64,2.07 40.17,9.53 35.68,9.53 35.05,10.16 35.05,12.06 35.81,12.83 38.1,12.83 38.86,12.06 39.35,12.06 R12.1
N174157: length 46.2
  TOP w0.203: SW1.1 66.55,41.02 66.29,41.27 62.08,41.27 SW1.2 54.1,41.02 52.83,39.75 v1(52.83,24.26)
  TOP w0.254: v1(49.53,12.47) U1.24
  BOTTOM w0.203: v1(49.53,12.47) 50.16,13.1 50.16,16.51 49.53,17.14 49.53,20.32 50.16,20.95 52.07,20.95 52.83,21.72 v1(52.83,24.26)
N174365: length 7.9
  BOTTOM w0.254: D6.1 47.5,7.37 47.1,7.76 R8.1 C8.2
  BOTTOM w0.508: v1(49.53,6.86) v1(49.53,8.51) v1(49.53,10.03)
N174377: length 11
  TOP w0.254: U1.13 53.95,17.16 53.34,17.78 51.18,17.78 50.83,18.13 L1.2
  BOTTOM w0.254: R5.1 C5.2 46.98,18.65 47.5,19.18 D7.1
  vias: v1(49.02,22.35) v1(49.02,21.84) v1(50.04,22.35) v1(50.04,21.84) v1(51.05,22.35) v1(51.05,21.84)
N174389: length 6.1
  TOP w0.254: U1.1 51.4,11.56 v1(50.16,11.56)
  BOTTOM w0.254: 48.4,11.56 C8.1 R8.2 ; 48.4,11.56 R14.1 ; 48.4,11.56 v1(50.16,11.56)
N174663: length 2.5
  TOP w0.254: U1.14 53.45,16.78 v1(53.21,17.02)
  BOTTOM w0.254: v1(53.21,17.02) 53.21,17.67 C3.2
N176009: length 2.3
  TOP w0.508: U10.5 41.39,40.35 Q1.2
N213516: length 6.5
  TOP w0.35: C43.2 62.74,28.34 L13.2 60.18,28.45 arc(59.73,28.26) 59.55,27.81 U11.11
N227281: length 1.6
  TOP w0.508: C28.1 L8.2
N403830: length 4.9
  TOP w0.254: v1(38.73,32.51) 38.73,34.97 38.65,35.05
  BOTTOM w0.254: v1(38.73,32.51) 38.1,32.51 37.73,32.88 L12.1
N640780: length 2.5
  TOP w0.254: LED2.1 v1(27.94,1.02)
  BOTTOM w0.254: v1(27.94,1.02) 29.2,1.02 R20.2
N641980: length 2.5
  TOP w0.254: LED3.1 v1(32.51,1.02)
  BOTTOM w0.254: v1(32.51,1.02) 32.5,1 R21.2
N1416060: length 2.7
  TOP w0.254: v1(58.8,42.55) LED5.1
  BOTTOM w0.254: R34.1 v1(58.8,42.55)
N1734530:
  vias: v1(62.36,9.4) v1(62.36,8.51) v1(62.36,7.62) v1(63.37,9.4) v1(63.37,8.51) v1(63.37,7.62) v1(64.39,9.4) v1(64.39,8.51) v1(64.39,7.62)
N10973881: length 39.2
  TOP w0.254: U16.1 37.91,32.57 34.29,36.2 30.73,36.2 29.97,36.96 29.97,42.55 29.21,43.31 14.22,43.31 13.64,42.72 SW2.3 13.03,42.54 8.64,42.54 8.46,42.72 SW2.4
N109732791: length 2.8
  TOP w0.254: U16.8 v1(44.7,31.24)
  BOTTOM w0.254: v1(44.7,31.24) 43.83,31.24 R44.2
N109733756: length 2.9
  TOP w0.254: U16.7 v1(44.7,29.97)
  BOTTOM w0.254: v1(44.7,29.97) 44.2,29.97 43.69,29.46 R45.2

## Copper pours and planes (outline as drawn; the poured copper is in the pictures)
GND on TOP (solid shape): 21.4,13.57 21.46,13.6 21.53,13.57 22.24,12.86 21.46,11.79 20.68,12.86
GND on TOP: 71.75,6.6 75.06,3.3 71.75,0 51.18,0 51.05,0.78 50.93,0 24.26,0 24,0.84 23.75,0 3.3,0 0,3.3 3.3,6.6 5.97,6.6 6.6,7.24 6.6,7.75 12.45,7.75 12.45,21.97 6.6,21.97 6.6,24.26 12.19,24.26 12.19,40.01 10.79,40.01 10.67,41.04 10.54,40.01 6.6,40.01 6.6,36.45 5.97,37.08 3.3,37.08 0,40.39 3.3,43.69 10.41,43.69 10.67,42.85 10.92,43.69 64.13,43.69 64.39,42.85 64.64,43.69 71.75,43.69 75.06,40.39 71.75,37.08 69.22,37.08 68.45,36.32 68.45,40.13 64.72,40.13 64.39,41.02 64.05,40.13 63.5,40.13 63.5,26.04 68.45,26.04 68.45,7.24 69.09,6.6 ; 46 cut-outs
GND on BOTTOM: 71.75,6.6 75.06,3.3 71.75,0 51.18,0 51.05,0.78 50.93,0 24.13,0 24,0.78 23.88,0 3.3,0 0,3.3 3.3,6.6 5.97,6.6 6.6,7.24 6.6,7.75 12.45,7.75 12.45,21.97 6.6,21.97 6.6,24.26 12.19,24.26 12.19,40.01 10.79,40.01 10.67,41.04 10.54,40.01 6.6,40.01 6.6,36.45 5.97,37.08 3.3,37.08 0,40.39 3.3,43.69 10.41,43.69 10.67,42.85 10.92,43.69 64.13,43.69 64.39,42.85 64.64,43.69 71.75,43.69 75.06,40.39 71.75,37.08 69.22,37.08 68.45,36.32 68.45,40.13 64.64,40.13 64.39,40.97 64.14,40.13 63.5,40.13 63.5,26.04 68.45,26.04 68.45,7.24 69.09,6.6 ; 27 cut-outs
VBUS on TOP: 60.96,17.14 61.21,17.4 63.25,17.4 63.63,17.02 63.63,15.24 63.37,14.99 61.21,14.99 60.96,15.24
VBUS on BOTTOM: 58.17,14.86 60.2,14.86 60.58,15.24 60.58,17.02 60.96,17.4 63.25,17.4 63.63,17.02 63.63,13.46 63.25,13.08 58.55,13.08 58.17,13.46
VCC1_3V3 on TOP (solid shape): 24.99,23.05 24.63,22.31 24.19,21.65 23.64,23 23.69,23.21 23.89,23.31
VCC2_3V3 on TOP (solid shape): 37.7,39.52 37.78,39.71 37.98,39.77 39.35,39.36 38.7,38.82 37.95,38.36
VCC2_3V3 on TOP (solid shape): 39.9,36.56 39.97,36.74 40.16,36.81 41.55,36.5 40.9,35.96 40.15,35.5
VCC2_3V3 on TOP (solid shape): 44.62,38.47 45.28,38.03 43.93,37.48 43.72,37.53 43.62,37.73 43.88,38.83
VCC2_3V3 on TOP (solid shape): 45.53,37.78 45.44,37.59 45.23,37.53 43.88,38.03 44.53,38.47 45.28,38.83
VCC2_3V3 on TOP (solid shape): 37.05,41.37 36.84,40.6 36.66,40.42 36.41,40.49 35.64,41.26 36.3,42
VCC_BAT on TOP (solid shape): 57.51,5.67 57.77,5.69 57.91,5.47 57.7,3.39 56.86,4.14 56.41,4.57
VCC_BAT on TOP: 54.36,13.59 56.39,13.59 57.91,12.06 57.91,3.43 57.02,3.43 56.64,3.81 56.64,12.45 55.75,13.34 54.36,13.34
VCC_BAT on BOTTOM: 57.15,12.19 57.15,10.67 59.69,10.67 59.69,12.19
BT_TXD on BOTTOM (solid shape): 14.95,38.49 14.92,38.41 14.84,38.39 13.85,38.6 14.31,39.59 14.85,40.4
P1.0 on BOTTOM (solid shape): 9.71,6.05 9.74,5.98 9.71,5.91 9.01,5.21 8.2,5.98 9.01,6.76
P1.0 on BOTTOM (solid shape): 14.66,5.98 13.85,5.21 13.15,5.91 13.12,5.98 13.15,6.05 13.85,6.76
P1.1 on BOTTOM (solid shape): 35.87,5.97 35.9,5.9 35.87,5.83 35.17,5.12 34.37,5.9 35.17,6.67
P1.1 on BOTTOM (solid shape): 40.82,5.9 40.01,5.12 39.31,5.83 39.28,5.9 39.31,5.97 40.01,6.67
P1.2 on TOP (solid shape): 62.02,6.07 62.06,5.98 62.02,5.89 61.33,5.21 60.52,5.98 61.33,6.76
P1.2 on TOP (solid shape): 66.99,5.98 66.18,5.21 65.49,5.89 65.45,5.98 65.49,6.07 66.18,6.76
P1.2 on BOTTOM (solid shape): 66.95,4.88 65.96,4.88 65.88,4.91 65.85,4.98 65.85,5.98 66.97,6
P3.7 on TOP (solid shape): 53.73,2.73 54.46,2.27 52.77,2.09 52.68,2.13 52.64,2.22 52.76,3.07
P5.7 on TOP (solid shape): 44.34,28.41 44.32,28.33 44.24,28.3 42.01,28.4 43.01,28.73 44.21,29
VMAX on TOP (solid shape): 60.25,19.42 60.34,19.38 60.38,19.28 60.15,17.79 59.48,18.52 58.85,19.29
VMAX on TOP: 54.36,14.1 55.24,14.1 57.15,16 57.15,18.41 58.04,19.3 60.2,19.3 60.2,15.49 58.42,15.49 56.77,13.84 54.36,13.84
W25QXX_SPI_CLK on TOP (solid shape): 34.06,28.8 34.03,28.7 33.94,28.66 31.68,28.78 32.66,29.11 33.88,29.38
N17872 on TOP (solid shape): 21.79,25.21 21.43,24.47 20.99,23.81 20.63,25 20.67,25.17 20.83,25.27
N17872 on TOP (solid shape): 21.79,23.05 21.43,22.31 20.99,21.65 20.5,22.94 20.55,23.14 20.74,23.24
N20890 on TOP (solid shape): 17.99,14.5 17.95,14.42 17.87,14.4 17.19,14.64 17.51,15.59 17.89,16.34
N21363 on TOP: 21.34,10.16 21.34,6.48 24.13,6.48 24.13,9.14 22.35,9.14 22.1,9.4 22.1,10.16
N23293 on TOP (solid shape): 9.49,9.79 9.53,9.66 9.5,9.54 9,9.13 7.94,9.6 9,10.08
N50230 on TOP (solid shape): 44.49,16.38 44.8,15.41 44.12,15.15 44.02,15.17 43.97,15.27 44.1,17.11
N174185 on TOP: 54.36,14.86 55.12,14.86 55.75,15.49 55.75,21.34 53.85,21.34 53.85,17.78 54.36,17.27
N174205 on TOP: 54.48,12.57 55.63,12.57 55.63,6.73 53.85,6.73 53.85,10.16 54.48,10.79
N174365 on TOP: 47.37,11.56 48.77,11.56 48.77,10.54 49.02,10.29 51.56,10.29 51.56,6.6 47.37,6.6
N174365 on BOTTOM: 48.13,8.13 48.13,6.6 49.78,6.6 49.78,8.13
N174377 on TOP: 51.82,17.65 51.82,22.61 47.37,22.61 47.37,17.65
N174377 on BOTTOM: 49.15,18.41 48.26,18.41 48.26,22.35 48.51,22.61 51.18,22.61 51.44,22.35 51.44,21.84 51.18,21.59 49.66,21.59 49.15,21.08
N176009 on TOP (solid shape): 41.38,40.61 41.55,40.55 41.64,40.39 41.55,39.31 40.81,39.77 40.15,40.31
N1734530 on TOP: 61.72,11.56 64.77,11.56 65.02,11.3 65.02,7.62 64.52,7.11 62.36,7.11 61.85,7.62 61.85,9.65 61.21,10.29 61.21,11.05 ; 1 cut-out
N1734530 on BOTTOM: 60.58,11.81 62.36,11.81 65.02,9.14 65.02,7.62 64.52,7.11 61.47,7.11 60.58,8
N10973881 on TOP (solid shape): 14.06,43.27 14.15,43.23 14.19,43.14 14.06,42.32 13.09,42.66 12.36,43.12
GND on TOP (solid shape): 51.12,5.02 51.16,4.93 51.12,4.84 50.54,4.26 49.83,4.93 50.54,5.61
GND on TOP (solid shape): 49.93,4.93 49.19,4.26 48.69,4.75 48.62,4.93 48.69,5.11 49.19,5.61
VBUS on TOP (solid shape): 59.97,11.62 60.05,11.64 60.12,11.62 60.55,11.14 60.05,10.51 59.55,11.14
VBUS on TOP (solid shape): 60.55,9.94 60.12,9.47 60.05,9.44 59.97,9.47 59.55,9.94 60.05,10.57
VBUS on TOP (solid shape): 59.76,13.04 59.73,12.93 59.63,12.88 58.44,13.01 58.94,13.35 59.5,13.66
VCC1_3V3 on TOP (solid shape): 25.65,22.49 25.69,22.35 25.65,22.22 24.99,21.65 24.52,22.35 24.99,23.05
VCC1_3V3 on TOP (solid shape): 25.39,7.6 25.57,7.52 25.63,7.34 25.35,6.58 24.86,6.95 24.46,7.39
VCC1_3V3 on BOTTOM (solid shape): 45.99,11.94 45.97,11.84 45.87,11.79 44.78,11.91 45.2,12.34 45.67,12.72
VCC1_3V3 on BOTTOM (solid shape): 30.02,15.55 30.43,15.09 29.62,14.57 29.39,14.61 29.29,14.81 29.54,15.9
VCC1_3V3 on BOTTOM (solid shape): 30.66,17.83 30.86,17.73 30.9,17.5 30.38,16.69 29.92,17.1 29.57,17.58
VCC1_3V3 on BOTTOM (solid shape): 32.18,23.67 32.54,23.19 31.45,22.94 31.24,23.04 31.2,23.27 31.73,24.08
VCC1_3V3 on BOTTOM (solid shape): 32.26,10.04 32.4,10.24 32.65,10.23 33.17,9.6 32.78,9.1 32.36,8.71
VCC1_3V3 on BOTTOM (solid shape): 37.64,30.81 37.76,31.02 37.99,31.04 38.81,30.43 38.38,29.92 37.9,29.51
VCC1_3V3 on BOTTOM (solid shape): 33.97,8.91 33.99,8.65 33.77,8.51 32.36,8.71 32.71,9.18 33.17,9.6
VCC2_3V3 on TOP (solid shape): 48.15,37.99 47.84,37.61 47.75,37.59 47.66,37.61 47.35,37.99 47.75,38.95
VCC2_3V3 on TOP (solid shape): 39.32,38.36 38.76,37.83 38.65,37.8 38.55,37.83 37.99,38.36 38.65,38.93
VCC2_3V3 on TOP (solid shape): 42.02,36.11 42.05,36 42.02,35.89 41.55,35.5 40.79,36 41.55,36.5
VCC_BAT on BOTTOM (solid shape): 50.83,20.11 50.93,20.09 50.98,19.99 50.85,19.03 50.38,19.41 49.96,19.84
VCC_BAT on BOTTOM (solid shape): 40.41,19.24 40.53,19.24 40.59,19.13 40.47,17.88 40.01,18.26 39.58,18.69
VCC_BKUP on TOP (solid shape): 49.25,37.99 48.94,37.61 48.85,37.59 48.76,37.61 48.45,37.99 48.85,38.95
VCC_BKUP on TOP (solid shape): 25.65,24.65 25.69,24.51 25.65,24.37 24.99,23.81 24.52,24.51 24.99,25.21
VCC_BKUP on TOP (solid shape): 44.44,36.29 44.58,36.33 44.71,36.29 45.28,35.63 44.58,35.17 43.88,35.63
12864_RESET on TOP (solid shape): 26.83,41.26 26.24,40.68 26.15,40.64 26.06,40.68 25.48,41.26 26.15,41.97
12864_ROM_IN on BOTTOM (solid shape): 52.23,41.26 51.62,40.66 51.55,40.63 51.48,40.66 50.88,41.26 51.55,41.96
12864_ROM_SCK on BOTTOM (solid shape): 47.15,41.26 46.54,40.66 46.47,40.63 46.4,40.66 45.8,41.26 46.47,41.96
12864_RS on TOP (solid shape): 29.37,41.26 28.78,40.68 28.69,40.64 28.6,40.68 28.02,41.26 28.69,41.97
12864_SCL on BOTTOM (solid shape): 34.45,41.26 33.86,40.68 33.77,40.64 33.68,40.68 33.1,41.26 33.77,41.97
/RST on BOTTOM (solid shape): 42.82,27.38 42.79,27.31 42.7,27.28 41.83,27.54 42.26,27.96 42.72,28.35
BMP180_SCL on TOP (solid shape): 16.91,33.13 16.86,33.03 16.76,33.01 15.78,33.28 16.26,33.7 16.78,34.08
BMP180_SDA on TOP (solid shape): 18.33,34.2 18.42,34.16 18.45,34.07 18.28,33.28 17.75,33.66 17.28,34.08
BT_EN on BOTTOM (solid shape): 40.28,33.48 40.25,33.4 40.16,33.38 39.29,33.63 39.72,34.06 40.18,34.44
BT_LED on BOTTOM (solid shape): 29.38,26.5 28.85,25.72 28.14,26.43 28.11,26.5 28.14,26.56 28.85,27.28
BT_RXD on BOTTOM (solid shape): 16.35,38.6 15.81,38.02 15.74,37.99 15.67,38.03 15.35,38.6 15.85,39.52
P1.0 on BOTTOM (solid shape): 16.18,6.71 16.27,6.64 16.24,6.53 15.41,5.7 14.61,5.97 15.34,6.76
P1.1 on BOTTOM (solid shape): 34.41,5.91 33.67,5.13 32.8,5.23 32.72,5.3 32.74,5.41 33.61,6.28
P3.6 on TOP (solid shape): 22.94,2.49 22.96,2.37 22.87,2.29 22.31,2.27 21.43,2.67 22.31,3.07
P3.6 on TOP (solid shape): 26.59,2.67 25.71,2.27 25.15,2.29 25.07,2.37 25.09,2.49 25.71,3.07
USB_PUR on BOTTOM (solid shape): 36.88,12.01 36.99,12.04 37.08,11.95 37.13,11.33 36.68,10.89 36.24,11.33
N12321 on BOTTOM (solid shape): 16.94,25.48 16.98,25.57 17.07,25.61 17.96,25.42 17.53,25 17.07,24.61
N13413 on TOP (solid shape): 32.64,31.5 32.78,31.54 32.92,31.5 33.77,30.65 32.78,30.29 31.78,30.65
N13413 on TOP (solid shape): 33.77,31.32 32.92,30.47 32.78,30.43 32.64,30.47 31.78,31.32 32.78,31.69
N16975 on TOP (solid shape): 13.6,24.12 13.18,23.64 13.1,23.62 13.03,23.64 12.6,24.12 13.1,25.05
N16975 on TOP (solid shape): 12.99,23.97 13.07,24.05 13.18,24.02 13.92,23.29 13.67,22.96 12.77,23.2
N16982 on TOP (solid shape): 15.63,25.02 15.1,24.2 14.37,24.94 14.34,25.02 14.37,25.1 15.1,25.83
N16982 on TOP (solid shape): 16.1,24.12 15.68,23.64 15.6,23.62 15.53,23.64 15.1,24.12 15.6,25.05
N17872 on TOP (solid shape): 18.66,24.13 18.81,24.18 18.95,24.14 19.81,23.29 18.86,22.92 17.88,23.27
N20883 on TOP (solid shape): 20.78,14.8 20.79,14.69 20.71,14.63 19.59,14.64 19.92,15.51 19.99,15.59
N21363 on TOP (solid shape): 22.06,14.2 22,14.11 21.9,14.12 21.14,14.88 21.57,15.26 22.02,15.65
N22769 on TOP (solid shape): 18.5,12.39 18.52,12.27 18.43,12.19 17.8,12.14 17.37,12.6 17.8,13.03
N22838 on TOP (solid shape): 17.14,14.05 17.16,13.92 17.05,13.84 15.6,13.89 15.97,14.35 16.41,14.78
N35776 on BOTTOM (solid shape): 31.35,38.6 30.86,38.02 30.71,37.98 30.56,38.05 30.35,38.6 30.86,39.56
N35854 on TOP (solid shape): 43.72,1.02 43.08,0.51 42.6,0.94 42.57,1.02 42.6,1.09 43.08,1.52
N49336 on BOTTOM (solid shape): 29.23,22.78 28.86,22.33 28.42,21.89 27.69,22.66 27.67,22.79 27.78,22.86
N50226 on TOP (solid shape): 42.07,16.28 42.4,15.41 41.06,15.35 40.95,15.42 40.97,15.55 41.93,16.52
N65101 on TOP (solid shape): 42.09,34.11 42.12,34.03 42.08,33.95 41.55,33.6 40.82,34.1 41.55,34.6
N66864 on TOP (solid shape): 42.13,38.31 42.23,38.15 42.2,37.96 41.55,37.41 40.79,37.9 41.55,38.41
N66864 on BOTTOM (solid shape): 42.1,38.23 42.11,37.99 41.92,37.85 40.59,37.95 40.98,38.37 41.48,38.76
N137490 on TOP (solid shape): 64.6,28.04 64.55,27.47 64.44,27.37 64.28,27.39 63.71,28.04 64.14,28.49
N141719 on TOP (solid shape): 48.74,27.95 48.81,27.97 48.88,27.95 49.21,27.57 48.81,26.64 48.41,27.57
N141719 on TOP (solid shape): 55.66,42.55 55.12,41.94 54.54,42.47 54.51,42.55 54.54,42.62 55.12,43.15
N173847 on TOP (solid shape): 59.33,9.94 58.75,9.32 58.65,9.29 58.57,9.35 58.33,9.94 58.83,10.57
N173883 on BOTTOM (solid shape): 49.36,16.26 49.47,16.18 49.45,16.05 48.72,15.34 48.25,15.74 47.83,16.15
N173931 on TOP (solid shape): 65.91,19.33 65.48,18.85 65.41,18.82 65.33,18.85 64.9,19.33 65.41,19.97
N173943 on TOP (solid shape): 67.36,21.03 67.44,21.06 67.51,21.03 67.95,20.55 67.44,19.91 66.93,20.55
N174029 on BOTTOM (solid shape): 39.76,12.46 40.18,12.04 38.86,11.96 38.77,12.02 38.78,12.13 39.43,12.77
N174157 on TOP (solid shape): 61.85,41.02 60.98,40.62 60.6,40.96 60.58,41.02 60.6,41.08 60.98,41.42
N174157 on TOP (solid shape): 63.26,41.37 63.33,41.31 63.31,41.21 62.68,40.62 61.8,41.02 62.68,41.42
N174157 on TOP (solid shape): 66.95,41.02 66.08,40.62 65.45,41.21 65.43,41.31 65.5,41.37 66.08,41.42
N174365 on BOTTOM (solid shape): 48.62,7.37 48.19,6.67 47.52,7.29 47.49,7.37 47.52,7.45 48.19,8.07
N174377 on BOTTOM (solid shape): 48.75,19.18 48.32,18.48 47.65,19.1 47.62,19.18 47.65,19.26 48.32,19.88
N174663 on BOTTOM (solid shape): 53.59,18.06 54.02,17.63 53.29,16.92 53.16,16.9 53.09,17.01 53.13,18.44
N176009 on TOP (solid shape): 42.07,41.26 41.57,40.77 41.39,40.69 41.21,40.77 40.72,41.26 41.39,42
N213516 on TOP (solid shape): 59.46,27.95 59.55,27.97 59.63,27.95 59.95,27.57 59.55,26.63 59.15,27.57
N403830 on TOP (solid shape): 39.35,34.55 38.83,33.83 38.74,33.79 38.66,33.82 37.95,34.55 38.65,35.08
N640780 on TOP (solid shape): 29.24,1.02 28.6,0.51 28.12,0.94 28.09,1.02 28.12,1.09 28.6,1.52
N641980 on TOP (solid shape): 32.33,1.09 32.36,1.02 32.33,0.94 31.85,0.51 31.21,1.02 31.85,1.52
N1416060 on TOP (solid shape): 58.75,42.62 58.78,42.55 58.75,42.47 58.17,41.94 57.63,42.55 58.17,43.15
N10973881 on TOP (solid shape): 37.83,32.28 37.91,32.3 37.99,32.28 38.73,31.54 37.91,31.21 37.1,31.54
N10973881 on TOP (solid shape): 9.51,42.62 9.53,42.51 9.47,42.43 8.96,42.32 8.08,42.73 8.96,43.12
N10973881 on TOP (solid shape): 13.24,42.73 12.36,42.32 11.85,42.43 11.78,42.51 11.81,42.62 12.36,43.12
N109733756 on BOTTOM (solid shape): 44.09,30 44.19,29.95 44.22,29.86 44.02,29.06 43.55,29.44 43.13,29.87

Small or netless copper shapes (teardrops, artwork), in the pictures only: 231 on TOP, 165 on BOTTOM

## Text on the board
Ref Des/Silkscreen Top: BY:XXXLZJXXX | DATE:2016_01_08 | NAME:CUITBIKE_V1.1_MSP430
DIMENSION: FIGURE | SIZE | 0.3048 | 0.381 | 0.9 | 0.9652 | 1.2 | 3.4036 | DRILL CHART: TOP to BOTTOM | ALL UNITS ARE IN MILLIMETERS | PLATED | QTY | 371 | 13 | 2 | 4 | 16 | 12
